# Altium PCB PCB2.PcbDoc (part 1 of 2)
Units mil, origin at the board's own origin, x right, y up, seen from the top; angles counter-clockwise.
Board outline 1075 x 1370 mil, 4 copper layers (Top Layer, Ground, Power, Bottom Layer), stack 61.4 mil thick; 62 components, 54 nets, 255 pads, 74 vias.
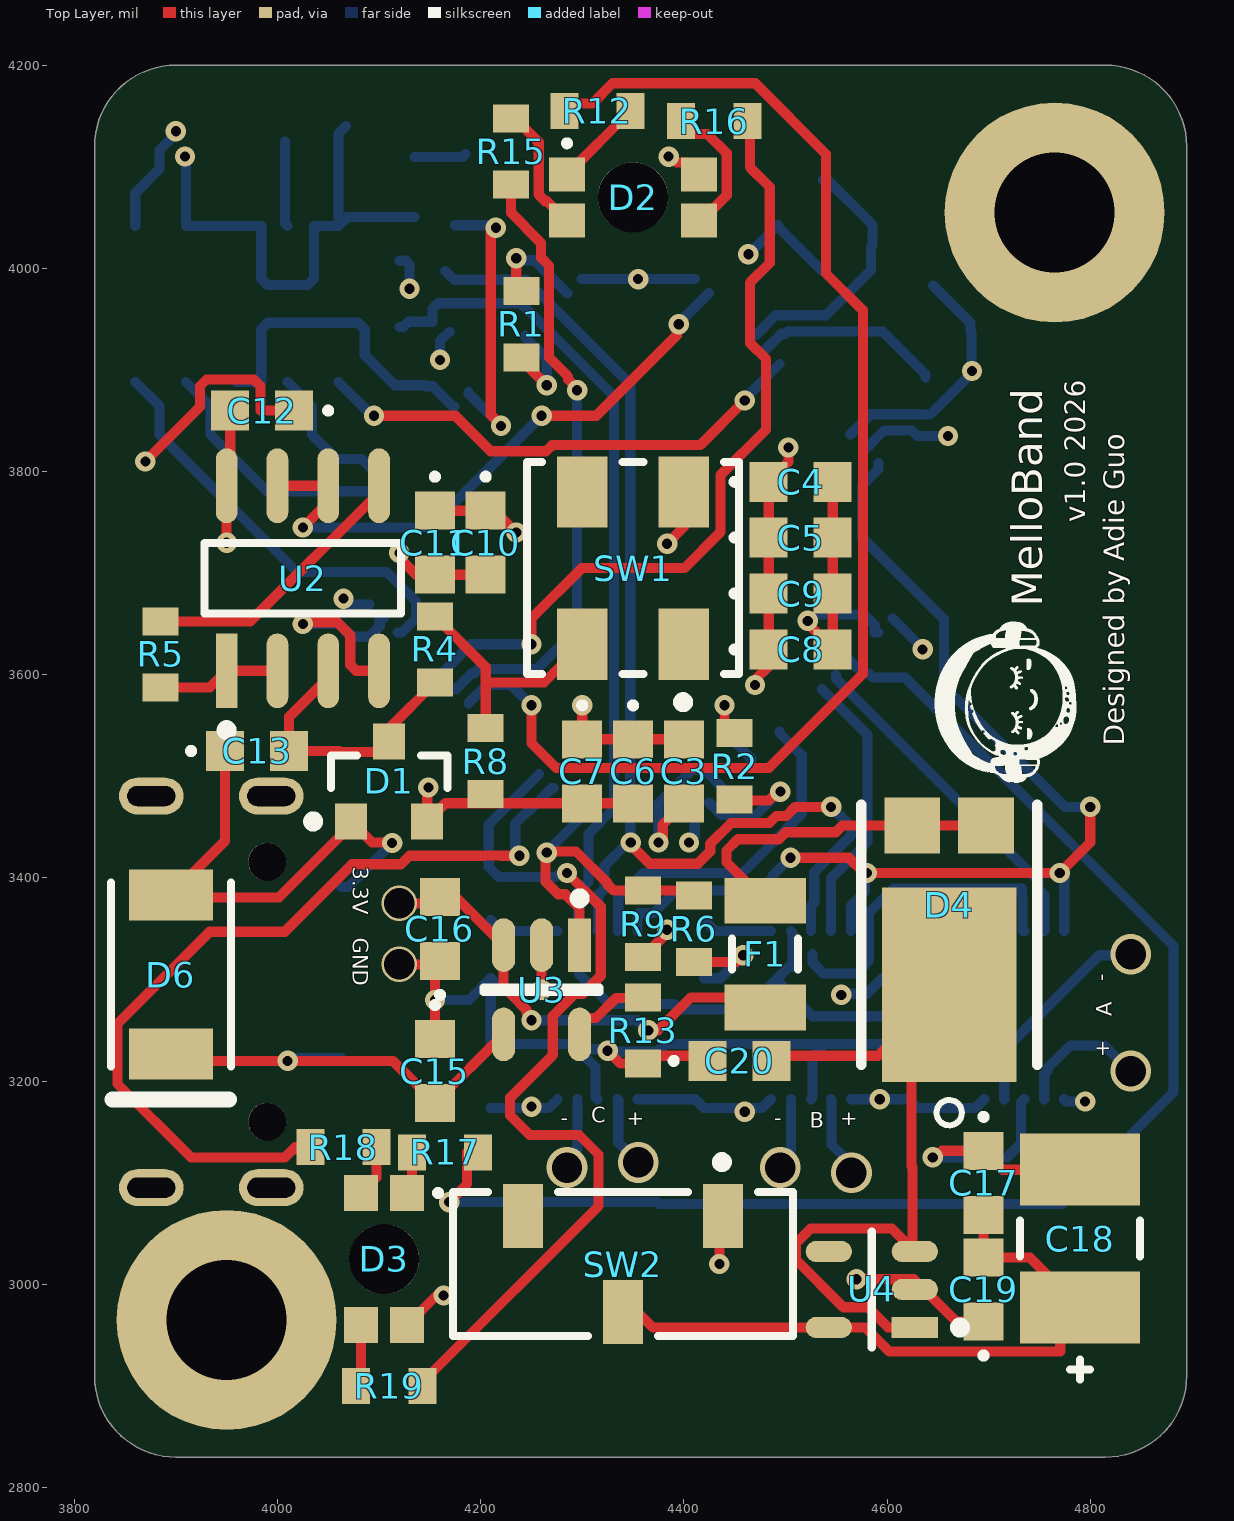
[diagram p0: Top Layer view]
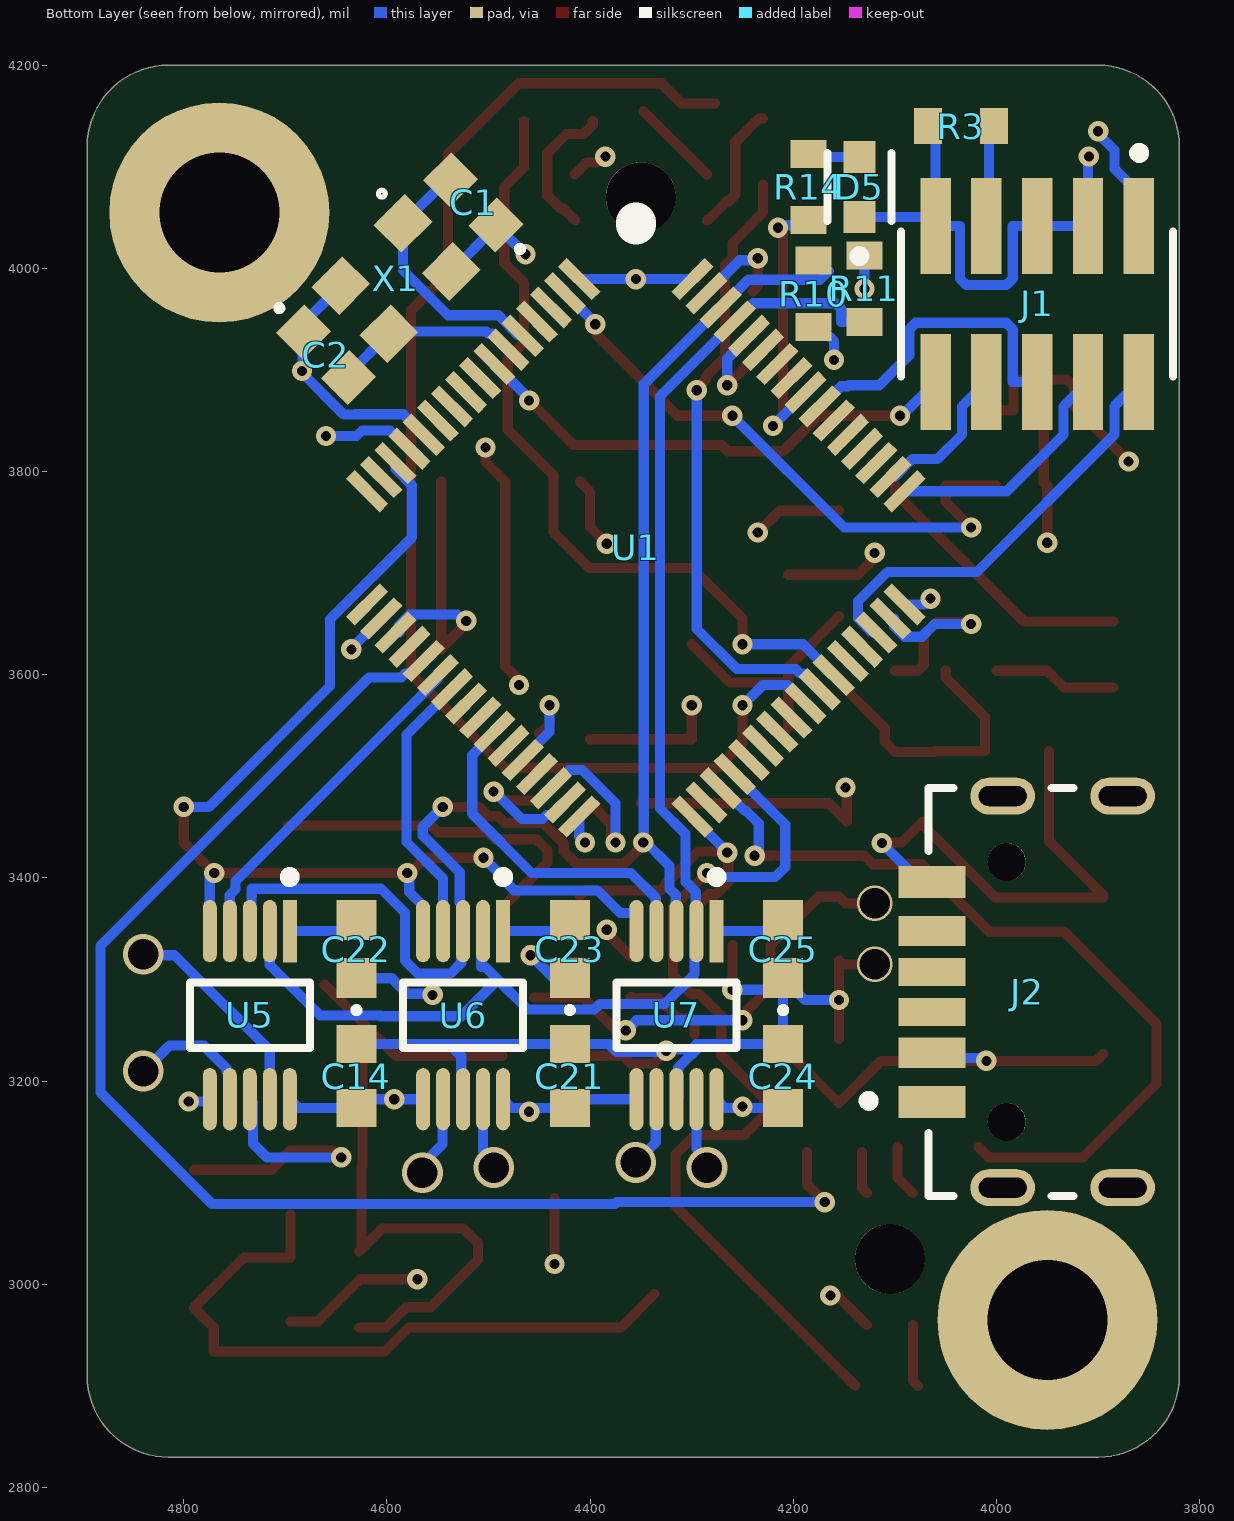
[diagram p1: Bottom Layer view, seen from below]
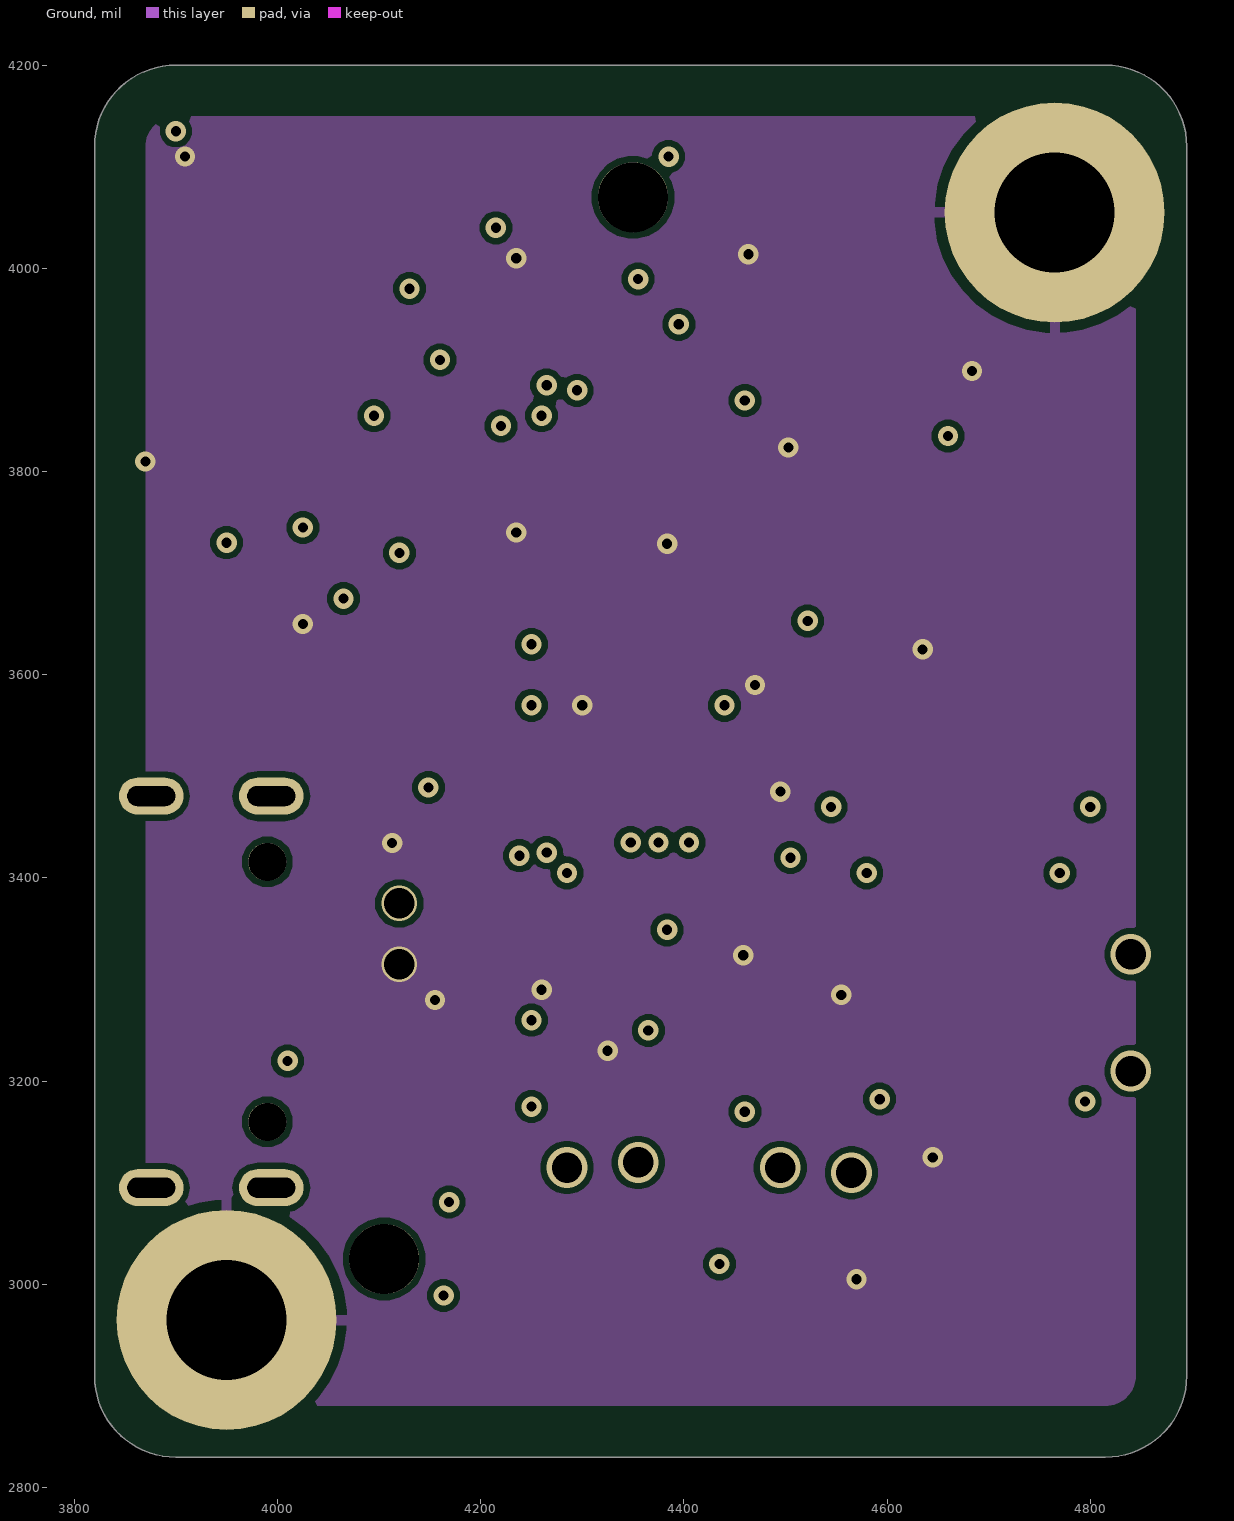
[diagram p2: Ground]
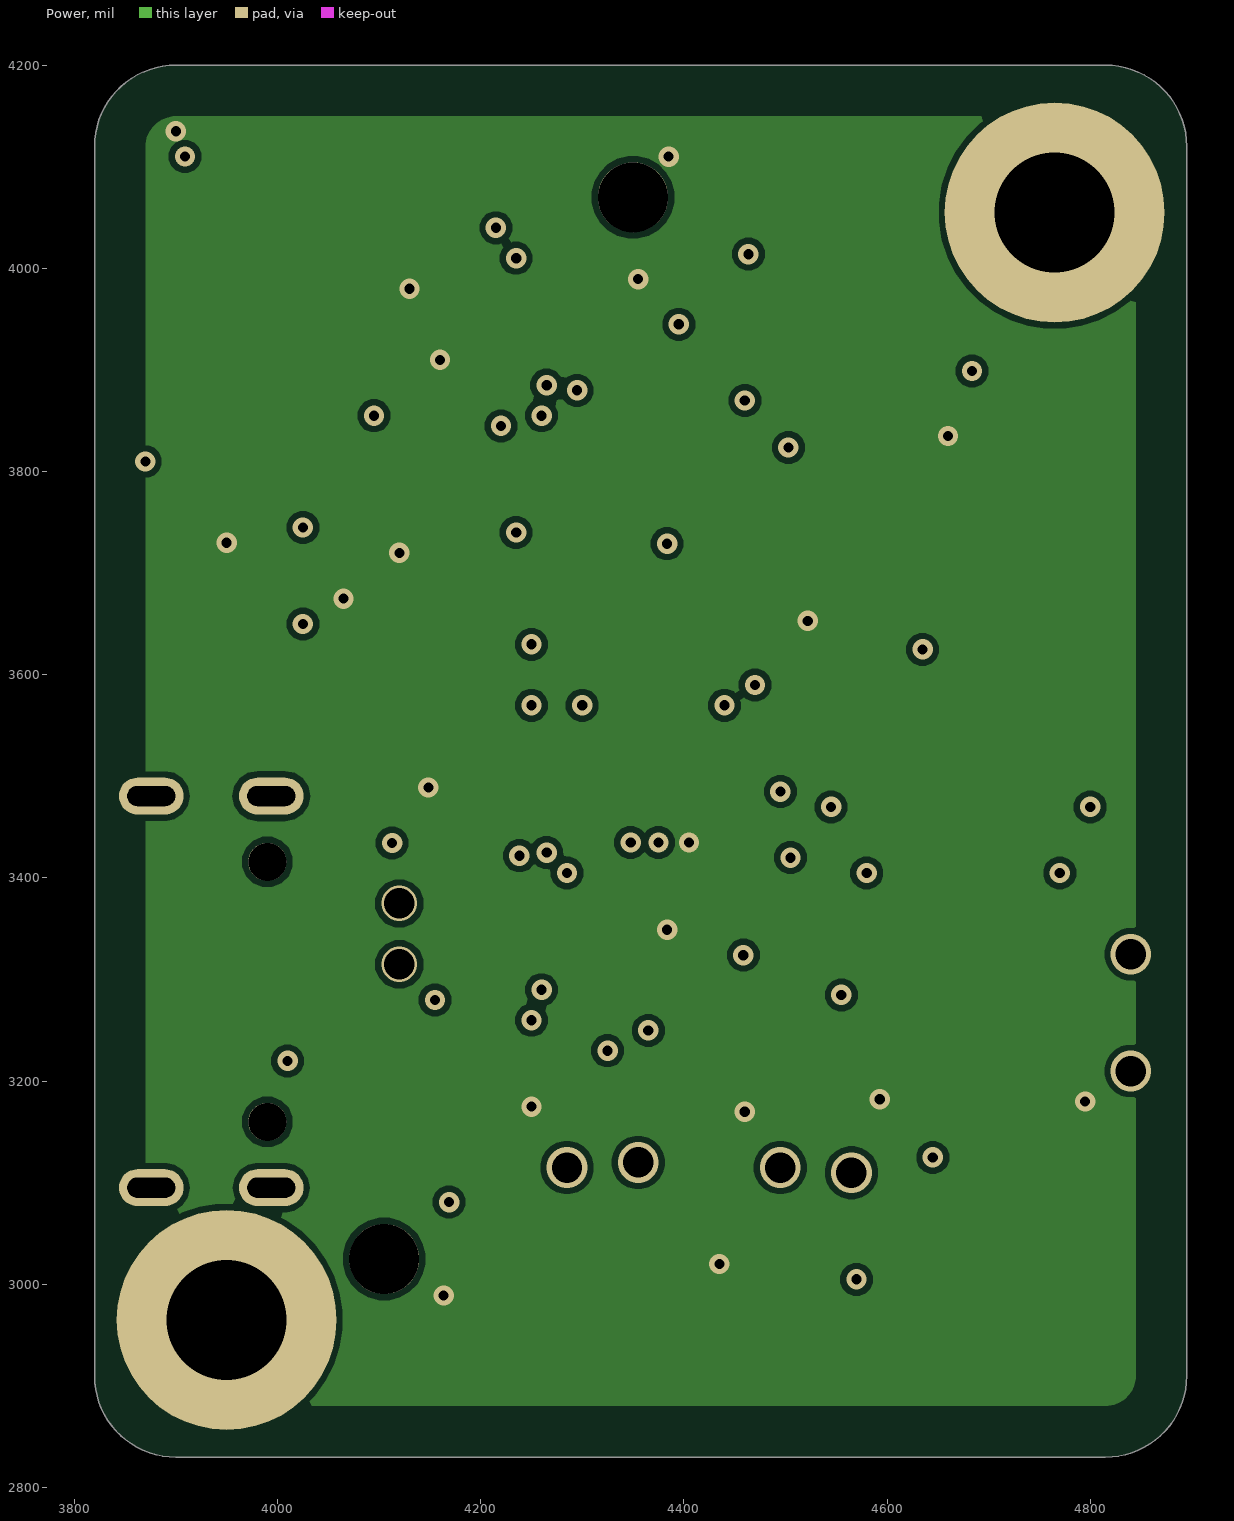
[diagram p3: Power]
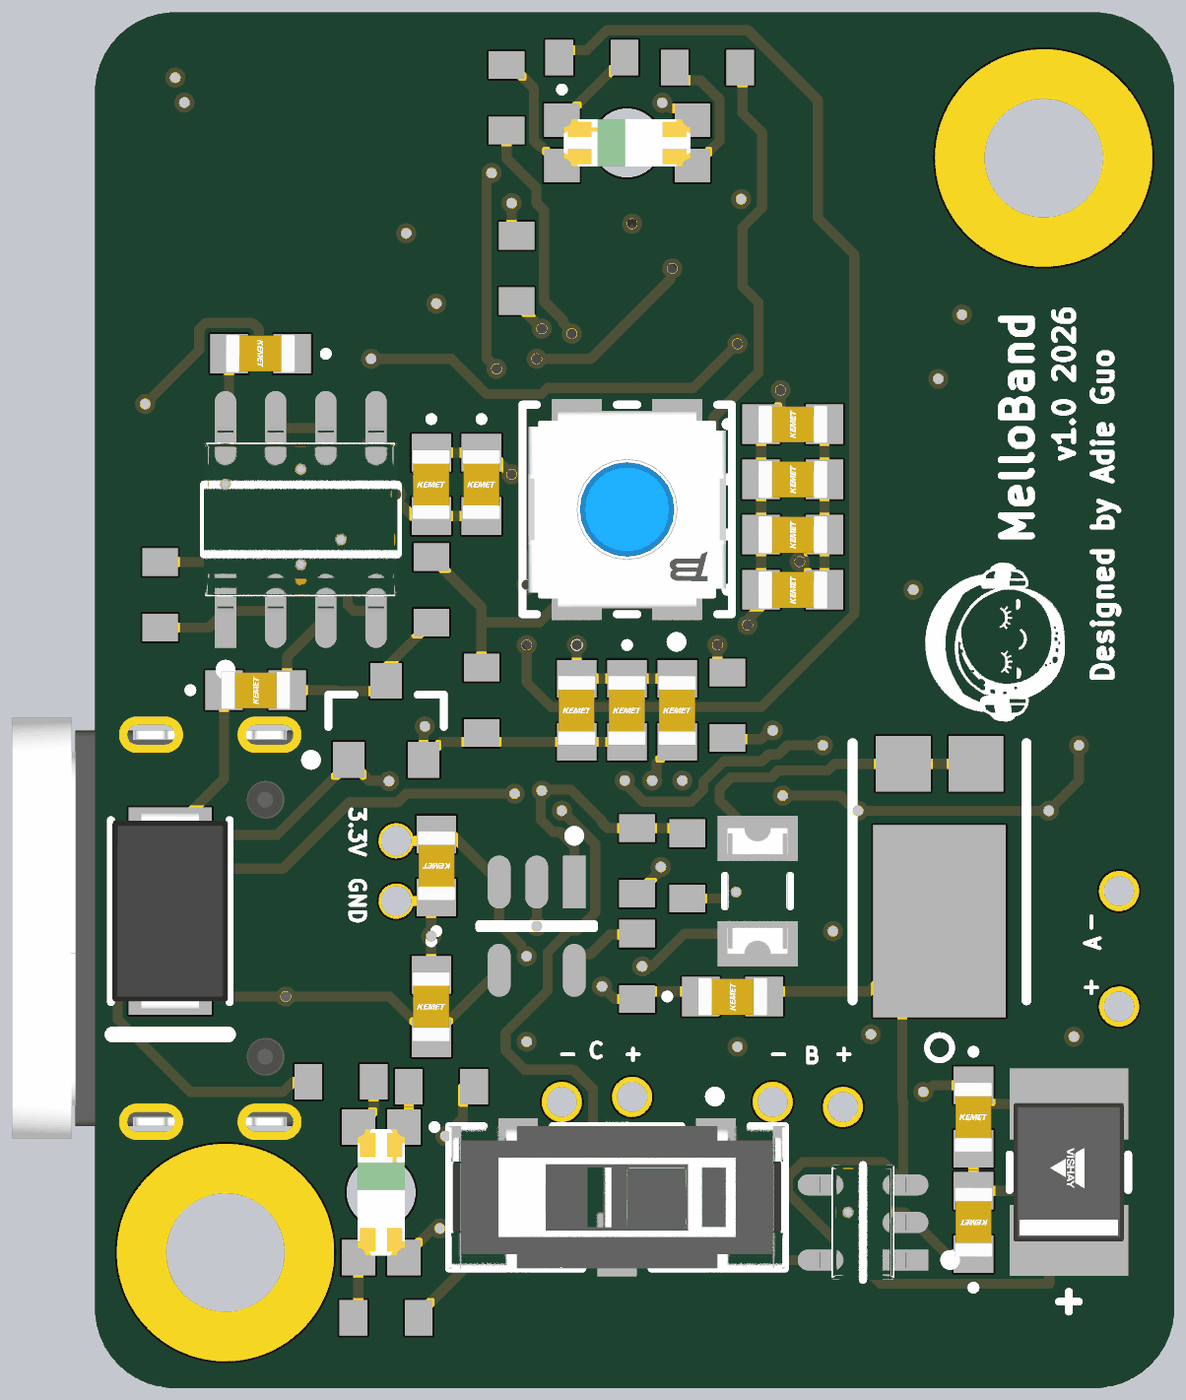
[diagram p4: 3D render of the assembled board from above, using the file's embedded part models]
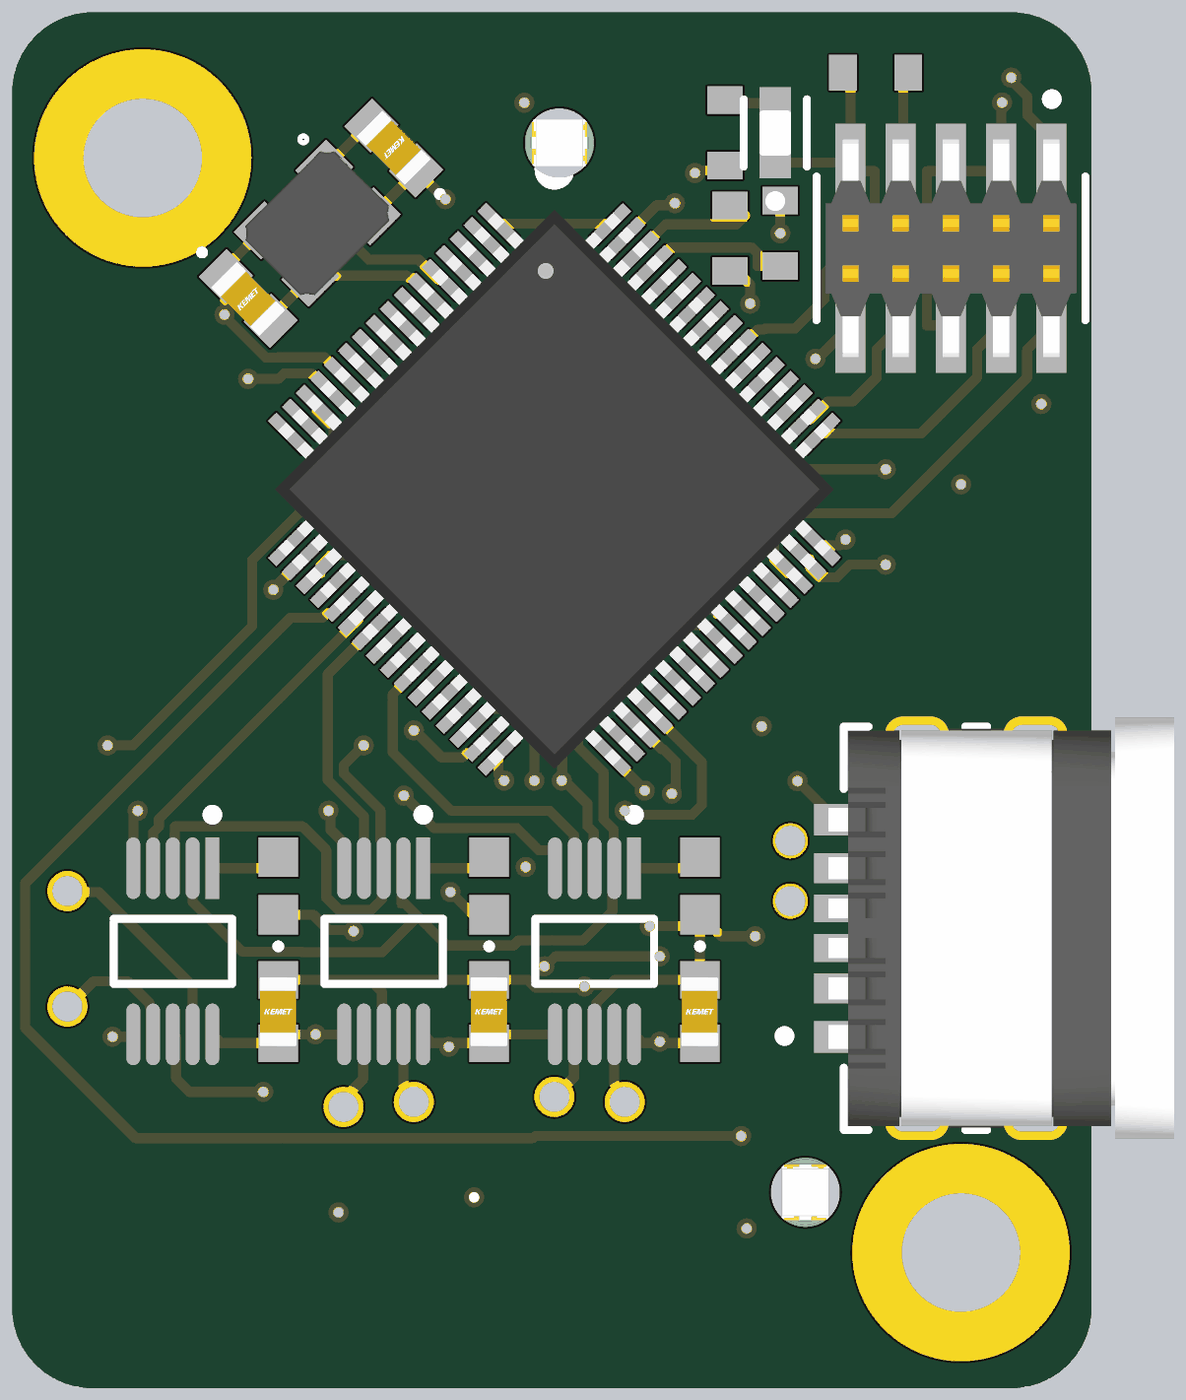
[diagram p5: 3D render of the assembled board from below, using the file's embedded part models]

## Layer stack, top to bottom
Top Solder: solder mask 0.4, Solder Resist, Dk 3.5
Top Layer: signal copper 1.4
Dielectric 2: prepreg 8.4, PP-006, Dk 4.1
Ground: signal copper 1.4
Dielectric 1: dielectric 39, FR-4, Dk 4.8
Power: signal copper 1.4
Dielectric 3: prepreg 8.4, PP-006, Dk 4.1
Bottom Layer: signal copper 1.4
Bottom Solder: solder mask 0.4, Solder Resist, Dk 3.5

## Board outline
3820,2910 3820,4120 cw(c3900,4120) 3900,4200 4815,4200 cw(c4815,4120) 4895,4120 4895,2910 cw(c4815,2910) 4815,2830 3900,2830 cw(c3900,2910)

## Design rules (kind name [scope] priority, off if disabled: settings)
BoardOutlineClearance [All] p1: gap=50 ignorepadtopadclearanceinfootprint=FALSE except(0: Arc-OutlineEdge Track-OutlineEdge Text-OutlineEdge; 20: SMDPad-OutlineEdge THPad-OutlineEdge Via-OutlineEdge Fill-OutlineEdge Region-OutlineEdge)
Clearance [All] p1: gap=6 ignorepadtopadclearanceinfootprint=FALSE except(4.5: Arc-SMDPad Track-SMDPad SMDPad-SMDPad)
DiffPairsRouting [All] p1: maxlimit=10 minlimit=8 mostfreqgap=10 toplayer_maxgap=8 toplayer_prefgap=8 toplayer_minwidth=8 toplayer_maxwidth=8 toplayer_prefwidth=8 midlayer1_mingap=10 midlayer1_minwidth=15 midlayer1_maxwidth=15 midlayer1_prefwidth=15 midlayer2_mingap=10 midlayer2_minwidth=15 midlayer2_maxwidth=15 midlayer2_prefwidth=15 bottomlayer_maxgap=8 bottomlayer_prefgap=8 bottomlayer_minwidth=8 bottomlayer_maxwidth=8 bottomlayer_prefwidth=8 maxuncoupledlength=500
HoleSize [All] p1: absolutevalues=TRUE maxlimit=500 minlimit=10 maxpercent=80.000 minpercent=20.000
MinimumAnnularRing [All] p1: minimumring=5
MinimumSolderMaskSliver [All] p1 off: minsoldermaskwidth=10
NetAntennae NetAntennae_MountingHoles [IsVia And InComponent('M*')] p1: netantennaetolerance=-1
NetAntennae [All] p2: netantennaetolerance=0
PolygonConnect PolygonConnect_Relief [IsPad and not (InComponent('M*'))] p1: connectstyle=Relief reliefconductorwidth=10 reliefentries=4 polygonreliefangle="90 Angle" airgapwidth=10
PolygonConnect PolygonConnect_Direct [All] p2: connectstyle=Direct reliefconductorwidth=10 reliefentries=4 polygonreliefangle="90 Angle" airgapwidth=10
RoutingVias [All] p1: holewidth=16 width=32 viastyle="Through Hole" minholewidth=16 minwidth=32 maxholewidth=100 maxwidth=200
ShortCircuit "Mounting Hole Exception" [IsVia And InComponent('M*') vs InComponent('M*')] p1: allowed=TRUE
ShortCircuit [All] p2: allowed=FALSE
SilkToSilkClearance [All] p1 off: silktosilkclearance=10
SilkToSolderMaskClearance [IsPad] p1 off: minsilkscreentomaskgap=10 clearancetoexposedcopper=TRUE
SolderMaskExpansion [All] p1: expansion=2 istentingtop=FALSE
Width [All] p1: maxlimit=500 minlimit=6 preferedwidth=10 midlayer1_minwidth=8 midlayer2_minwidth=8 minimp=50.000000 maximp=50.000000 favimp=50.000000
23 further rules are at their usual default settings.

## Classes and differential pairs
component class Power: 43 C15 C16 C17 C18 C19 C20 D4 D6 F1 R6 R9 R13 U3 U4
component class MCU-power: C3 C4 C5 C6 C7 C8 C9 C10 C11
component class MCU-io: C1 C2 J1 R1 R2 R3 U1 X1
component class Interface: D2 D3 D5 R8 R12 R14 R15 R16 R17 R18 R19 SW1 SW2
component class "Haptic Drivers": C14 C21 C22 C23 C24 C25 R10 R11 U5 U6 U7
component class "Analog Input Conditioning": C12 C13 D1 R4 R5 U2

## Components (designator, comment, footprint, x,y, rotation, side; value= is the part's Value field where it differs from the comment)
C1 "CL10C100JB8NNNC" CAP-0603 4515,4065 r45 bottom
C2 "CL10C100JB8NNNC" CAP-0603 4660,3915 r225 bottom
C3 "CL10A475KO8NNNC" CAP-0603 4400,3505 r270 top
C4 "CC0603KRX7R9BB104" CAP-0603 4515,3790 r0 top
C5 "CL10A105KB8NNNC" CAP-0603 4515,3735 r0 top
C6 "CL10A106KP8NNNC" CAP-0603 4350,3505 r270 top
C7 "CC0603KRX7R9BB104" CAP-0603 4300,3505 r270 top
C8 "CC0603KRX7R9BB104" CAP-0603 4515,3625 r0 top
C9 "CC0603KRX7R9BB104" CAP-0603 4515,3680 r0 top
C10 "CC0603KRX7R9BB104" CAP-0603 4205,3730 r270 top
C11 "CC0603KRX7R9BB104" CAP-0603 4155,3730 r270 top
C12 "CC0603KRX7R9BB104" CAP-0603 3985,3860 r180 top
C13 "CL10B473KB8NNNC" CAP-0603 3980,3525 r0 top
C14 "CC0603KRX7R9BB104" CAP-0603 4630,3205 r270 bottom
C15 "CL10A475KO8NNNC" CAP-0603 4155,3210 r270 top
C16 "CL10A475KO8NNNC" CAP-0603 4160,3350 r90 top
C17 "CL10A105KB8NNNC" CAP-0603 4695,3100 r270 top
C18 "293D106X9025B2TE3" FP-293DB-MFG 4790,3045 r270 top
C19 "CC0603KRX7R9BB104" CAP-0603 4695,2995 r90 top
C20 "CL10A106KP8NNNC" CAP-0603 4455,3220 r0 top
C21 "CC0603KRX7R9BB104" CAP-0603 4420,3205 r270 bottom
C22 "1uF" CAP_SM0603_YAGEOCC2_N 4630,3330 r270 bottom
C23 "1uF" CAP_SM0603_YAGEOCC2_N 4420,3330 r270 bottom
C24 "CC0603KRX7R9BB104" CAP-0603 4210,3205 r270 bottom
C25 "1uF" CAP_SM0603_YAGEOCC2_N 4210,3330 r270 bottom
D1 "MMBD452LT1G" ONSC-SOT-23-3-318-08_V 4110,3495 r90 top
D2 "156125M173000" "WL-SFRW_1205_reverse use" 4350,4070 r0 top
D3 "156125M173000" "WL-SFRW_1205_reverse use" 4105,3025 r270 top
D4 "SBRT15U50SP5-13" SBRT15U50SP5-13 4661.22,3295 r180 top
D5 "LTST-C193TBKT-5A" FP-LTST-C193TBKT-5A-MFG 4135,4080 r90 bottom
D6 "SMAJ5.0A" BOUR-SMA-2_V 3895,3305 r270 top
F1 "500mA" FP-0466-MFG 4480,3325 r90 top value=0.248Ω
J1 "20021121-00010C4LF" FP-20021121-00010C4LF-MFG 3960,3965 r0 bottom
J2 "217176-0001" FP-217176-0001-MFG 3908.31,3287.95 r90 bottom
R1 "0603WAF1002T5E" RES-0603 4240,3945 r90 top
R2 "0603WAF1002T5E" RES-0603 4450,3510 r270 top
R3 "0603WAF1002T5E" RES-0603 4035,4140 r0 bottom
R4 "0603WAF1002T5E" RES-0603 4155,3625 r270 top
R5 "0603WAF2201T5E" RES-0603 3885,3620 r90 top
R6 "10K" RES_SM0603_YAGEORC_N 4410,3350 r90 top
R8 "10K" RES_SM0603_YAGEORC_N 4205,3515 r270 top
R9 "10K" RES_SM0603_YAGEORC_N 4360,3355 r270 top
R10 "2K2" RES_SM0603_YAGEORC_N 4180,3975 r270 bottom
R11 "2K2" RES_SM0603_YAGEORC_N 4130,3980 r90 bottom
R12 "0603WAF1000T5E" RES-0603 4315,4155 r180 top
R13 "0603WAF2001T5E" RES-0603 4360,3250 r90 top
R14 "0603WAF1000T5E" RES-0603 4185,4080 r90 bottom
R15 "0603WAF1000T5E" RES-0603 4230,4115 r270 top
R16 "0603WAF1000T5E" RES-0603 4430,4145 r0 top
R17 "0603WAF1000T5E" RES-0603 4165,3130 r0 top
R18 "0603WAF1000T5E" RES-0603 4065,3135 r180 top
R19 "0603WAF1000T5E" RES-0603 4110,2900 r0 top
SW1 "7914J-1-032E" FP-7914J-1-032E-MFG 4350,3705 r180 top
SW2 "JS102011JCQN" FP-JS102011JCQN-MFG 4340,3020 r180 top
U1 "IC MCU 32BIT 1MB FLASH 64LQFP" LQFP64-10x10mm 4355,3725 r225 bottom value=Value
U2 "OPA2991IDR" FP-D0008A-IPC_C 4025,3695 r90 top
U3 "MCP73831T-2ACI/OT" FP-C04-091-OT-IPC_B 4260,3290 r270 top
U4 "MIC5219-3.3YM5-TR" FP-SOT23-5LD-PL-1-IPC_C 4585,2995 r180 top
U5 "DRV2605LTDGSRQ1" FP-DGS0010A-IPC_B 4735,3265 r270 bottom
U6 "DRV2605LTDGSRQ1" FP-DGS0010A-IPC_B 4525,3265 r270 bottom
U7 "DRV2605LTDGSRQ1" FP-DGS0010A-IPC_B 4315,3265 r270 bottom
X1 "7M-25.000MEEQ-T" OSCSC320X250X100N 4591.11,3990 r225 bottom

## Footprints (in the part's own frame and the unit in brackets; to place one, negate y for a bottom-side part, rotate by r counter-clockwise, add the part's x,y. Pads: shape width x height; smd on the part's side, far side on the other; paste and mask are expansions set on the pad)
BOUR-SMA-2_V [mm] "SMA, 2-Leads, Body 4.57x2.92mm"
  rect 1.27x2.1 smd: 1(-1.985,0) 2(1.985,0)
  silkscreen extent -2.3,-1.5 3.12,1.5, body extent -2.5,-1.46 2.5,1.46, height 2.62
CAP-0603 [mm]
  rect 0.95x1 smd: 1(-0.8,0) 2(0.8,0)
  silkscreen extent -1.7,-0.05 -1.6,0.05, body extent -0.87,-0.48 0.88,0.47, height 0.87
CAP_SM0603_YAGEOCC2_N [mm] "Capacitor, Yageo CC Class2, SM0603, IPC Medium Density"
  rect 1x1 smd: 1(-0.727,0) 2(0.727,0)
  body extent -0.9,-0.5 0.9,0.5, height 0.9
FP-293DB-MFG [mm]
  rect 1.8x3 smd paste+0 mask+0: 1(-1.725,0) 2(1.725,0)
  silkscreen extent -0.45,-1.5 3.53,1.5, body extent -2.73,-1.6 2.73,1.6, height 0.25
FP-0466-MFG [mil]
  rect 45x80 smd paste+0 mask+0: 1(-52.5,0) 2(52.5,0)
  silkscreen extent -15,-32 15,32, body extent -79,-44 79,44, height 10
FP-7914J-1-032E-MFG [mm]
  rect 1.27x1.78 smd paste+0 mask+0: 1_1-(-1.27,1.905) 1_2+(1.27,1.905) 2_1-(-1.27,-1.905) 2_2+(1.27,-1.905)
  silkscreen extent -2.65,-2.65 2.65,3.47, body extent -2.75,-2.9 2.75,2.9, height 0.25
FP-217176-0001-MFG [mm]
  rrect100% 0.92x1.62 hole 1.2 slot 0.5 at 0 deg paste-1000 mask+0: 1(-4.895,2.175) 2(4.895,2.175) 3(-4.895,-0.825) 4(4.895,-0.825)
  rect 0.8x1.67 smd paste+0 mask+0: C1(-2.75,3.94) C6(2.75,3.94)
  rect 0.76x1.67 smd paste+0 mask+0: C2(-1.52,3.94) C5(1.52,3.94)
  rect 0.7x1.67 smd paste+0 mask+0: C3(-0.5,3.94) C4(0.5,3.94)
  round 0.95 hole 0.95 unplated paste-1000 mask+0: ""(-3.25,2.075) ""(3.25,2.075)
  silkscreen extent -5.1,0.4 5.1,5.65, body extent -5.32,-4.34 5.32,4.42, height 4.81
FP-20021121-00010C4LF-MFG [mm]
  rect 0.76x2.4 smd paste+0 mask+0: 1(-2.54,-1.95) 2(-2.54,1.95) 3(-1.27,-1.95) 4(-1.27,1.95) 5(0,-1.95) 6(0,1.95) 7(1.27,-1.95) 8(1.27,1.95) 9(2.54,-1.95) 10(2.54,1.95)
  silkscreen extent -3.4,-3.9 3.4,1.82, body extent -3.18,-2.75 3.17,2.75, height 4.85
FP-C04-091-OT-IPC_B [mm]
  rect 1.338x0.578 smd paste+0 mask+0: 1(-1.116,0.95)
  rrect100% 1.338x0.578 smd paste+0 mask+0: 2(-1.116,0) 3(-1.116,-0.95) 4(1.116,-0.95) 5(1.116,0.95)
  silkscreen extent -2.41,-1.45 0.05,1.45
FP-D0008A-IPC_C [mil]
  rect 73.59x21.34 smd paste+0 mask+0: 1(-91.09,75)
  rrect100% 73.59x21.34 smd paste+0 mask+0: 2(-91.09,25) 3(-91.09,-25) 4(-91.09,-75) 5(91.09,-75) 6(91.09,-25) 7(91.09,25) 8(91.09,75)
  silkscreen extent -154,-97 35,97, body extent -132,-100 132,100, height 10
FP-DGS0010A-IPC_B [mm]
  rect 1.557x0.35 smd paste+0 mask+0: 1(-2.101,1)
  rrect100% 1.557x0.35 smd paste+0 mask+0: 2(-2.101,0.5) 3(-2.101,0) 4(-2.101,-0.5) 5(-2.101,-1) 6(2.101,-1) 7(2.101,-0.5) 8(2.101,0) 9(2.101,0.5) 10(2.101,1)
  silkscreen extent -3.58,-1.5 0.82,1.5
FP-JS102011JCQN-MFG [mm]
  rect 1x1.6 smd paste+0 mask+0: 1(-2.5,-1.2) 2(0,1.2) 3(2.5,-1.2)
  silkscreen extent -4.25,-2.67 4.25,1.8, body extent -4.35,-2.1 4.35,2.1, height 0.25
FP-LTST-C193TBKT-5A-MFG [mm]
  rect 0.8x0.8 smd paste+0 mask+0: 1(-0.75,0) 2(0.75,0)
  silkscreen extent -1.85,-0.8 0.85,0.8, body extent -0.8,-0.4 0.8,0.4, height 0.45
FP-SOT23-5LD-PL-1-IPC_C [mm]
  rect 1.156x0.53 smd paste+0 mask+0: 1(-1.075,0.95)
  rrect100% 1.156x0.53 smd paste+0 mask+0: 2(-1.075,0) 3(-1.075,-0.95) 4(1.075,-0.95) 5(1.075,0.95)
  silkscreen extent -2.33,-1.45 0,1.45, body extent -1.4,-1.45 1.4,1.45, height 1.45
LQFP64-10x10mm [mil]
  rect 47x12 smd: 1(-226.38,147.64) 2(-226.38,127.95) 3(-226.38,108.27) 4(-226.38,88.58) 5(-226.38,68.9) 6(-226.38,49.21) 7(-226.38,29.53) 8(-226.38,9.84) 9(-226.38,-9.84) 10(-226.38,-29.53) 11(-226.38,-49.21) 12(-226.38,-68.9) 13(-226.38,-88.58) 14(-226.38,-108.27) 15(-226.38,-127.95) 16(-226.38,-147.64) 33(226.38,-147.64) 34(226.38,-127.95) 35(226.38,-108.27) 36(226.38,-88.58) 37(226.38,-68.9) 38(226.38,-49.21) 39(226.38,-29.53) 40(226.38,-9.84) 41(226.38,9.84) 42(226.38,29.53) 43(226.38,49.21) 44(226.38,68.9) 45(226.38,88.58) 46(226.38,108.27) 47(226.38,127.95) 48(226.38,147.64)
  rect 12x47 smd: 17(-147.64,-226.38) 18(-127.95,-226.38) 19(-108.27,-226.38) 20(-88.58,-226.38) 21(-68.9,-226.38) 22(-49.21,-226.38) 23(-29.53,-226.38) 24(-9.84,-226.38) 25(9.84,-226.38) 26(29.53,-226.38) 27(49.21,-226.38) 28(68.9,-226.38) 29(88.58,-226.38) 30(108.27,-226.38) 31(127.95,-226.38) 32(147.64,-226.38) 49(147.64,226.38) 50(127.95,226.38) 51(108.27,226.38) 52(88.58,226.38) 53(68.9,226.38) 54(49.21,226.38) 55(29.53,226.38) 56(9.84,226.38) 57(-9.84,226.38) 58(-29.53,226.38) 59(-49.21,226.38) 60(-68.9,226.38) 61(-88.58,226.38) 62(-108.27,226.38) 63(-127.95,226.38) 64(-147.64,226.38)
  silkscreen extent -226,225 -225,226, body extent -236,-236 236,236, height 63
ONSC-SOT-23-3-318-08_V [mm] "SOT23, 3-Leads, Body 2.92x1.3mm, Pitch 0.95mm"
  rect 0.9x0.8 smd: 1(-1,0.95) 2(-1,-0.95) 3(1,0)
  silkscreen extent -1.12,-1.46 0.65,2.02, body extent -0.65,-1.46 0.65,1.46, height 1.11
OSCSC320X250X100N [mm]
  rect 0.98x1.1 smd: 1(-0.85,1.1) 2(-0.85,-1.1) 3(0.85,-1.1) 4(0.85,1.1)
  silkscreen extent -1.84,1.16 -1.66,1.34, body extent -1.24,-1.6 1.24,1.6, height 0.99
RES-0603 [mm] "Resistor, Yageo RC_L, SM0603, IPC Medium Density"
  rect 0.7x0.9 smd: 1(-0.827,0) 2(0.827,0)
  body extent -0.85,-0.45 0.85,0.45, height 0.55
RES_SM0603_YAGEORC_N [mm] "Resistor, Yageo RC_L, SM0603, IPC Medium Density"
  rect 0.7x0.9 smd: 1(-0.827,0) 2(0.827,0)
  body extent -0.85,-0.45 0.85,0.45, height 0.55
SBRT15U50SP5-13 [mm]
  rect 1.39x1.4 smd: 1(-0.92,-3.982) 1(0.92,-3.982)
  rect 3.36x4.86 smd: 2(0,0)
  silkscreen extent -2.2,-4.5 2.2,3.52, body extent -2,-4.6 2,2.4, height 1.05
"WL-SFRW_1205_reverse use" [mm] "SMD Full-color Reverse mount LED, body 3.2x1.2mm"
  rect 0.9x0.85 smd: 1(-1.65,0.575) 2(-1.65,-0.575) 3(1.65,-0.575) 4(1.65,0.575)
  round 1.75 hole 1.75 unplated: MH1(0,0)
  silkscreen extent -1.72,1.28 -1.57,1.42, body extent -1.6,-0.6 1.6,0.6, height 0.28

## Part data
C1 C2: "Capacitor, Ceramic (MLCC), 10pF, ±5%, 50V, C0G, ±5%, SMD 0603", Capacitance=10pF, JLCPCB Basic Part=Yes, JLCPCB Part Number=C1634, Manufacturer="Samsung Electro-Mechanics", Package Size=0603, Temperature Coefficient=C0G, Temperature Rating="-55°C ~ 125°C", Tolerance=±5%, Voltage Rating=50V, Category="Capacitors - MLCC", ComponentLink1Description=Datasheet, ComponentLink1URL=https://wmsc.lcsc.com/wmsc/upload/file/pdf/v2/lcsc/2304140030_Samsung-Electro-Mechanics-CL10C100JB8NNNC_C1634.pdf, ComponentLink2Description="JLCPCB Part URL", ComponentLink2URL=https://jlcpcb.com/partdetail/C1634, ComponentLink3Description="LCSC Part URL", ComponentLink3URL=https://lcsc.com/product-detail/Multilayer-Ceramic-Capacitors-MLCC---SMD-SMT_Samsung-Electro-Mechanics-Samsung-Electro-Mechanics-CL10C100JB8NNNC_C1634.html, ComponentLink4Description="Samsung Component Library", ComponentLink4URL=https://weblib.samsungsem.com/mlcc/mlcc-ec.do?partNumber=CL10C100JB8NNN, Impedance (0V Bias) @ 1GHz=12.8Ω, Impedance (0V Bias) @ 2GHz=1.36Ω, Impedance (0V Bias) @ 5GHz=12.1Ω, Impedance (0V Bias) @ 100MHz=159Ω, Impedance (0V Bias) @ 500MHz=30.3Ω, Manufacturer Part Number=CL10C100JB8NNNC, RoHS=Yes, Supplier 1=LCSC, Supplier Part Number 1=C1634
C3 C15 C16: "Capacitor, Ceramic (MLCC), 4.7uF, ±10%, 16V, X5R, ±10%, SMD 0603", Capacitance=4.7uF, Capacitance @ 1.2V DC Bias=4.030uF, Capacitance @ 1.5V DC Bias=3.908uF, Capacitance @ 1.8V DC Bias=3.769uF, Capacitance @ 1.35V DC Bias=3.972uF, Capacitance @ 1V DC Bias=4.097uF, Capacitance @ 2.5V DC Bias=3.406uF, Capacitance @ 3.3V DC Bias=2.969uF, Capacitance @ 3.7V DC Bias=2.760uF, Capacitance @ 4.2V DC Bias=2.508uF, Capacitance @ 5V DC Bias=2.138uF, Capacitance @ 9V DC Bias=1.155uF, Capacitance @ 12V DC Bias=0.873uF, Capacitance @ 15V DC Bias=0.647uF, JLCPCB Basic Part=Yes, JLCPCB Part Number=C19666, Manufacturer="Samsung Electro-Mechanics", Package Size=0603, Temperature Coefficient=X5R, Temperature Rating="-55°C ~ 85°C", Tolerance=±10%, Voltage Rating=16V, Category="Capacitors - MLCC", ComponentLink1Description=Datasheet, ComponentLink1URL=https://wmsc.lcsc.com/wmsc/upload/file/pdf/v2/lcsc/2304140030_Samsung-Electro-Mechanics-CL10A475KO8NNNC_C19666.pdf, ComponentLink2Description="JLCPCB Part URL", ComponentLink2URL=https://jlcpcb.com/partdetail/C19666, ComponentLink3Description="LCSC Part URL", ComponentLink3URL=https://lcsc.com/product-detail/Multilayer-Ceramic-Capacitors-MLCC---SMD-SMT_Samsung-Electro-Mechanics-Samsung-Electro-Mechanics-CL10A475KO8NNNC_C19666.html, ComponentLink4Description="Samsung Component Library", ComponentLink4URL=https://weblib.samsungsem.com/mlcc/mlcc-ec.do?partNumber=CL10A475KO8NNN, Impedance (0V Bias) @ 1GHz=1.02Ω, Impedance (0V Bias) @ 1kHz=46Ω, Impedance (0V Bias) @ 1MHz=0.05Ω, Impedance (0V Bias) @ 2GHz=2.37Ω, Impedance (0V Bias) @ 5GHz=4.65Ω, Impedance (0V Bias) @ 5kHz=9.51Ω, Impedance (0V Bias) @ 5MHz=0.011Ω, Impedance (0V Bias) @ 10kHz=4.83Ω, Impedance (0V Bias) @ 10MHz=0.0248Ω, Impedance (0V Bias) @ 50kHz=0.996Ω, Impedance (0V Bias) @ 50MHz=0.0811Ω, Impedance (0V Bias) @ 100Hz=437Ω, Impedance (0V Bias) @ 100kHz=0.505Ω, Impedance (0V Bias) @ 100MHz=0.141Ω, Impedance (0V Bias) @ 500Hz=90.6Ω, Impedance (0V Bias) @ 500kHz=0.104Ω, Impedance (0V Bias) @ 500MHz=0.57Ω, Impedance (16V Bias) @ 1GHz=1.06Ω, Impedance (16V Bias) @ 1kHz=381Ω, Impedance (16V Bias) @ 1MHz=0.386Ω, Impedance (16V Bias) @ 2GHz=2.36Ω, Impedance (16V Bias) @ 5GHz=4.63Ω, Impedance (16V Bias) @ 5kHz=77.1Ω, Impedance (16V Bias) @ 5MHz=0.077Ω, Impedance (16V Bias) @ 10kHz=38.7Ω, Impedance (16V Bias) @ 10MHz=0.0173Ω, Impedance (16V Bias) @ 50kHz=7.82Ω, Impedance (16V Bias) @ 50MHz=0.0836Ω, Impedance (16V Bias) @ 100Hz=3.74E+03Ω, Impedance (16V Bias) @ 100kHz=3.93Ω, Impedance (16V Bias) @ 100MHz=0.142Ω, Impedance (16V Bias) @ 500Hz=758Ω, Impedance (16V Bias) @ 500kHz=0.79Ω, Impedance (16V Bias) @ 500MHz=0.585Ω, Manufacturer Part Number=CL10A475KO8NNNC, RoHS=Yes, Supplier 1=LCSC, Supplier Part Number 1=C19666
C4 C7 C8 C9 C10 C11 C12 C14 C19 C21 C24: "Capacitor, Ceramic (MLCC), 100nF, ±10%, 50V, X7R, ±10%, SMD 0603", Capacitance=100nF, JLCPCB Basic Part=Yes, JLCPCB Part Number=C14663, Manufacturer=YAGEO, Package Size=0603, Temperature Coefficient=X7R, Tolerance=±10%, Voltage Rating=50V, Category="Capacitors - MLCC", ComponentLink1Description=Datasheet, ComponentLink1URL=https://wmsc.lcsc.com/wmsc/upload/file/pdf/v2/lcsc/2211101700_YAGEO-CC0603KRX7R9BB104_C14663.pdf, ComponentLink2Description="JLCPCB Part URL", ComponentLink2URL=https://jlcpcb.com/partdetail/C14663, ComponentLink3Description="LCSC Part URL", ComponentLink3URL=https://lcsc.com/product-detail/Multilayer-Ceramic-Capacitors-MLCC---SMD-SMT_YAGEO-YAGEO-CC0603KRX7R9BB104_C14663.html, Manufacturer Part Number=CC0603KRX7R9BB104, RoHS=Yes, Supplier 1=LCSC, Supplier Part Number 1=C14663
C5 C17: "Capacitor, Ceramic (MLCC), 1uF, ±10%, 50V, X5R, ±10%, SMD 0603", Capacitance=1uF, Capacitance @ 1.2V DC Bias=1.044uF, Capacitance @ 1.5V DC Bias=1.027uF, Capacitance @ 1.8V DC Bias=1.007uF, Capacitance @ 1.35V DC Bias=1.035uF, Capacitance @ 1V DC Bias=1.054uF, Capacitance @ 2.5V DC Bias=0.947uF, Capacitance @ 3.3V DC Bias=0.865uF, Capacitance @ 3.7V DC Bias=0.824uF, Capacitance @ 4.2V DC Bias=0.773uF, Capacitance @ 5V DC Bias=0.695uF, Capacitance @ 9V DC Bias=0.410uF, Capacitance @ 12V DC Bias=0.308uF, Capacitance @ 15V DC Bias=0.231uF, Capacitance @ 24V DC Bias=0.130uF, Capacitance @ 36V DC Bias=0.080uF, Capacitance @ 48V DC Bias=0.063uF, JLCPCB Basic Part=Yes, JLCPCB Part Number=C15849, Manufacturer="Samsung Electro-Mechanics", Package Size=0603, Temperature Coefficient=X5R, Temperature Rating="-55°C ~ 85°C", Tolerance=±10%, Voltage Rating=50V, Category="Capacitors - MLCC", ComponentLink1Description=Datasheet, ComponentLink1URL=https://wmsc.lcsc.com/wmsc/upload/file/pdf/v2/lcsc/2304140030_Samsung-Electro-Mechanics-CL10A105KB8NNNC_C15849.pdf, ComponentLink2Description="JLCPCB Part URL", ComponentLink2URL=https://jlcpcb.com/partdetail/C15849, ComponentLink3Description="LCSC Part URL", ComponentLink3URL=https://lcsc.com/product-detail/Multilayer-Ceramic-Capacitors-MLCC---SMD-SMT_Samsung-Electro-Mechanics-Samsung-Electro-Mechanics-CL10A105KB8NNNC_C15849.html, ComponentLink4Description="Samsung Component Library", ComponentLink4URL=https://weblib.samsungsem.com/mlcc/mlcc-ec.do?partNumber=CL10A105KB8NNN, Impedance (0V Bias) @ 1GHz=0.988Ω, Impedance (0V Bias) @ 1kHz=191Ω, Impedance (0V Bias) @ 1MHz=0.208Ω, Impedance (0V Bias) @ 2GHz=2.38Ω, Impedance (0V Bias) @ 5GHz=4.94Ω, Impedance (0V Bias) @ 5kHz=39.1Ω, Impedance (0V Bias) @ 5MHz=0.0293Ω, Impedance (0V Bias) @ 10kHz=19.8Ω, Impedance (0V Bias) @ 10MHz=0.0159Ω, Impedance (0V Bias) @ 50kHz=4.04Ω, Impedance (0V Bias) @ 50MHz=0.0822Ω, Impedance (0V Bias) @ 100Hz=1.84E+03Ω, Impedance (0V Bias) @ 100kHz=2.04Ω, Impedance (0V Bias) @ 100MHz=0.14Ω, Impedance (0V Bias) @ 500Hz=378Ω, Impedance (0V Bias) @ 500kHz=0.416Ω, Impedance (0V Bias) @ 500MHz=0.54Ω, Manufacturer Part Number=CL10A105KB8NNNC, RoHS=Yes, Supplier 1=LCSC, Supplier Part Number 1=C15849
C6 C20: "Capacitor, Ceramic (MLCC), 10uF, ±10%, 10V, X5R, ±10%, SMD 0603", Capacitance=10uF, Capacitance @ 1.2V DC Bias=8.084uF, Capacitance @ 1.5V DC Bias=7.497uF, Capacitance @ 1.8V DC Bias=6.915uF, Capacitance @ 1.35V DC Bias=7.793uF, Capacitance @ 1V DC Bias=8.451uF, Capacitance @ 2.5V DC Bias=5.691uF, Capacitance @ 3.3V DC Bias=4.464uF, Capacitance @ 3.7V DC Bias=3.996uF, Capacitance @ 4.2V DC Bias=3.516uF, Capacitance @ 5V DC Bias=2.897uF, Capacitance @ 9V DC Bias=1.372uF, JLCPCB Basic Part=Yes, JLCPCB Part Number=C19702, Manufacturer="Samsung Electro-Mechanics", Package Size=0603, Temperature Coefficient=X5R, Temperature Rating="-55°C ~ 85°C", Tolerance=±10%, Voltage Rating=10V, Category="Capacitors - MLCC", ComponentLink1Description=Datasheet, ComponentLink1URL=https://wmsc.lcsc.com/wmsc/upload/file/pdf/v2/lcsc/2304140030_Samsung-Electro-Mechanics-CL10A106KP8NNNC_C19702.pdf, ComponentLink2Description="JLCPCB Part URL", ComponentLink2URL=https://jlcpcb.com/partdetail/C19702, ComponentLink3Description="LCSC Part URL", ComponentLink3URL=https://lcsc.com/product-detail/Multilayer-Ceramic-Capacitors-MLCC---SMD-SMT_Samsung-Electro-Mechanics-Samsung-Electro-Mechanics-CL10A106KP8NNNC_C19702.html, ComponentLink4Description="Samsung Component Library", ComponentLink4URL=https://weblib.samsungsem.com/mlcc/mlcc-ec.do?partNumber=CL10A106KP8NNN, Impedance (0V Bias) @ 1GHz=0.788Ω, Impedance (0V Bias) @ 1kHz=22.6Ω, Impedance (0V Bias) @ 1MHz=0.0217Ω, Impedance (0V Bias) @ 2GHz=1.8Ω, Impedance (0V Bias) @ 5GHz=3.33Ω, Impedance (0V Bias) @ 5kHz=4.64Ω, Impedance (0V Bias) @ 5MHz=0.0144Ω, Impedance (0V Bias) @ 10kHz=2.35Ω, Impedance (0V Bias) @ 10MHz=0.0227Ω, Impedance (0V Bias) @ 50kHz=0.481Ω, Impedance (0V Bias) @ 50MHz=0.0729Ω, Impedance (0V Bias) @ 100Hz=217Ω, Impedance (0V Bias) @ 100kHz=0.243Ω, Impedance (0V Bias) @ 100MHz=0.123Ω, Impedance (0V Bias) @ 500Hz=44.6Ω, Impedance (0V Bias) @ 500kHz=0.0484Ω, Impedance (0V Bias) @ 500MHz=0.439Ω, Impedance (10V Bias) @ 1GHz=0.786Ω, Impedance (10V Bias) @ 1kHz=162Ω, Impedance (10V Bias) @ 1MHz=0.161Ω, Impedance (10V Bias) @ 2GHz=1.77Ω, Impedance (10V Bias) @ 5GHz=3.28Ω, Impedance (10V Bias) @ 5kHz=32.7Ω, Impedance (10V Bias) @ 5MHz=0.0215Ω, Impedance (10V Bias) @ 10kHz=16.4Ω, Impedance (10V Bias) @ 10MHz=0.0228Ω, Impedance (10V Bias) @ 50kHz=3.3Ω, Impedance (10V Bias) @ 50MHz=0.0759Ω, Impedance (10V Bias) @ 100Hz=1.6E+03Ω, Impedance (10V Bias) @ 100kHz=1.66Ω, Impedance (10V Bias) @ 100MHz=0.123Ω, Impedance (10V Bias) @ 500Hz=323Ω, Impedance (10V Bias) @ 500kHz=0.331Ω, Impedance (10V Bias) @ 500MHz=0.443Ω, Manufacturer Part Number=CL10A106KP8NNNC, RoHS=Yes, Supplier 1=LCSC, Supplier Part Number 1=C19702
C13: "Capacitor, Ceramic (MLCC), 47nF, ±10%, 50V, X7R, ±10%, SMD 0603", Capacitance=47nF, Capacitance @ 1.2V DC Bias=47.280nF, Capacitance @ 1.5V DC Bias=47.357nF, Capacitance @ 1.8V DC Bias=47.426nF, Capacitance @ 1.35V DC Bias=47.319nF, Capacitance @ 1V DC Bias=47.231nF, Capacitance @ 2.5V DC Bias=47.515nF, Capacitance @ 3.3V DC Bias=47.532nF, Capacitance @ 3.7V DC Bias=47.514nF, Capacitance @ 4.2V DC Bias=47.475nF, Capacitance @ 5V DC Bias=47.375nF, Capacitance @ 9V DC Bias=46.446nF, Capacitance @ 12V DC Bias=45.320nF, Capacitance @ 15V DC Bias=44.061nF, Capacitance @ 24V DC Bias=39.258nF, Capacitance @ 36V DC Bias=31.412nF, Capacitance @ 48V DC Bias=23.014nF, JLCPCB Basic Part=Yes, JLCPCB Part Number=C1622, Manufacturer="Samsung Electro-Mechanics", Package Size=0603, Temperature Coefficient=X7R, Temperature Rating="-55°C ~ 125°C", Tolerance=±10%, Voltage Rating=50V, Category="Capacitors - MLCC", ComponentLink1Description=Datasheet, ComponentLink1URL=https://wmsc.lcsc.com/wmsc/upload/file/pdf/v2/lcsc/2304140030_Samsung-Electro-Mechanics-CL10B473KB8NNNC_C1622.pdf, ComponentLink2Description="JLCPCB Part URL", ComponentLink2URL=https://jlcpcb.com/partdetail/C1622, ComponentLink3Description="LCSC Part URL", ComponentLink3URL=https://lcsc.com/product-detail/Multilayer-Ceramic-Capacitors-MLCC---SMD-SMT_Samsung-Electro-Mechanics-Samsung-Electro-Mechanics-CL10B473KB8NNNC_C1622.html, ComponentLink4Description="Samsung Component Library", ComponentLink4URL=https://weblib.samsungsem.com/mlcc/mlcc-ec.do?partNumber=CL10B473KB8NNN, Impedance (0V Bias) @ 1GHz=1.81Ω, Impedance (0V Bias) @ 1kHz=3.4E+03Ω, Impedance (0V Bias) @ 1MHz=3.65Ω, Impedance (0V Bias) @ 2GHz=4.68Ω, Impedance (0V Bias) @ 5GHz=10.5Ω, Impedance (0V Bias) @ 5kHz=693Ω, Impedance (0V Bias) @ 5MHz=0.738Ω, Impedance (0V Bias) @ 10kHz=349Ω, Impedance (0V Bias) @ 10MHz=0.364Ω, Impedance (0V Bias) @ 50kHz=71.1Ω, Impedance (0V Bias) @ 50MHz=0.0607Ω, Impedance (0V Bias) @ 100Hz=3.3E+04Ω, Impedance (0V Bias) @ 100kHz=35.7Ω, Impedance (0V Bias) @ 100MHz=0.192Ω, Impedance (0V Bias) @ 500Hz=6.73E+03Ω, Impedance (0V Bias) @ 500kHz=7.27Ω, Impedance (0V Bias) @ 500MHz=0.928Ω, Manufacturer Part Number=CL10B473KB8NNNC, RoHS=Yes, Supplier 1=LCSC, Supplier Part Number 1=C1622
C18: library part CMP-02414-000016-1, "TANTALUM CAP 10000000 PF 10%", Capacitance=10uF, Case Code (Imperial)=1411, Case Code (Metric)=3528, Case/Package=Molded, Dielectric Material=Tantalum, ESR (Equivalent Series Resistance)=2.3R, Leakage Current=2.5uA, Max Operating Temperature=125°C, Min Operating Temperature=-55°C, Package Quantity=2000, Ripple Current=190mA, Tolerance=10%, Voltage Rating=25V, Voltage Rating (DC)=200kV, Depth=2.8mm, Dissipation Factor=6%, Height=2.1mm, Lead Free="Lead Free", Length=3.5mm, Packaging="Tape and Reel", Polarity=Polar, Radiation Hardening=No, RoHS Compliant=Yes, Series=293D, Termination=SMD/SMT, Weight=0.002293oz, Width=1.9mm
C22 C23 C25: library part CC0603KRX7R9BB105, "CAP 1uF SM0603 X7R 50V YAGEO CC2", Manufacturer=Yageo, Manufacturer Part Number=CC0603KRX7R9BB183, Package=0603, Supplier Part Number 1=3019743, Tolerance (%)=10, Voltage Rating (Volts)=50, Category=Capacitor, ComponentLink1Description="Manufacturer Website", ComponentLink1URL=http://www.yageo.com, Supplier 1=Farnell, Supplier 2=Digi-Key
D1: "30V SCHOTTKY", Manufacturer="On Semiconductor", ComponentLink1Description="Manufacturer URL", ComponentLink1URL=http://www.onsemi.com/, ComponentLink2Description=Datasheet, ComponentLink2URL=http://www.onsemi.cn/pub_link/Collateral/MMBD452LT1-D.PDF, ComponentLink3Description="Package Specification", ComponentLink3URL=http://www.onsemi.cn/pub_link/Collateral/318-08.PDF, Configuration=Dual, DatasheetVersion="Rev. 4", Manufacturer Part Number=MMBD452LT1G, Mounting Technology="Surface Mount", PackageDescription="3-Pin Small Outline Transistor, Body 2.92 x 1.3 mm, Pitch 0.95 mm", PackageReference=SOT-23-3-318-08, PackageVersion="Rev. AP, 11/2009", Packing="Tape and Reel", PartNumber=MMBD452LT1G, RoHS=TRUE
D2 D3: library part CMP-207942-000006-2, "LED RGB CLEAR 4SMD BOTTOM ENTRY", Color="Blue, Green, Red", Forward Current=40mA, Forward Voltage=2V, Max Operating Temperature=85°C, Max Reverse Voltage (DC)=5V, Min Operating Temperature=-40°C, Power Dissipation=48mW, Dominant Wavelength=525nm, Height=800µm, Length=3.2mm, Luminous Intensity=70mcd, NexarPartId=82270997, Packaging="Tape and Reel", Peak Wavelength=468nm, Reverse Voltage=5V, RoHS=Compliant, Viewing Angle=120°, Width=1.2mm
D4: "Reverse Polarity Protection", Capacitance @ Vr, F=-, Current - Average Rectified (Io)=15A, Manufacturer="Diodes Incorporated", Operating Temperature - Junction="-65°C ~ 150°C", Package / Case="PowerDI™ 5", Supplier Device Package=PowerDI®5, Supplier Part Number 1=SBRT15U50SP5-13DICT-ND, Category="Discrete Semiconductor Products", ComponentLink1Description=https://media.digikey.com/pdf/Data%20Sheets/Diodes%20PDFs/SBRT15U50SP5.pdf, ComponentLink1URL=https://media.digikey.com/pdf/Data%20Sheets/Diodes%20PDFs/SBRT15U50SP5.pdf, Diode Type="Super Barrier", Manufacturer Part Number=SBRT15U50SP5-13, Mounting Type="Surface Mount", Packaging="Cut Tape (CT)", Part Status=Active, Pricing 1="1=0.93, 10=0.823, 100=0.6306, 500=0.49852, 1000=0.39882 (USD)", RoHS="RoHS Compliant", Speed="Fast Recovery =< 500ns, > 200mA (Io)", Stock 1=12134, Supplier 1=Digi-Key
D5: library part CMP-2000-06624-2, "LED BLUE CLEAR CHIP SMD", Case Code (Imperial)=0603, Case Code (Metric)=1608, Color=Blue, Forward Current=20mA, Forward Voltage=2.8V, Lens Color=Colorless, Max Operating Temperature=80°C, Min Operating Temperature=-20°C, Package Quantity=1, Power Dissipation=76mW, Reverse Voltage=5V, Test Current=5mA, Case/Package=0603, Depth=0.8mm, Dominant Wavelength=475nm, Height=0.35mm, Illumination Color=Blue, Lead Free="Lead Free", Length=1.6mm, Lens Style=Diffused, Lens Transparency=Clear, Luminous Intensity=15mcd, Mount="Surface Mount", Number of Elements=1, Number of LEDs=1, Number of Pins=2, Packaging="Tape and Reel", Radiation Hardening=No, RoHS Compliant=Yes, Viewing Angle=130°, Width=0.8mm
D6: library part CMP-2000-07090-1, "SMAJ Transient Voltage Suppressor Diode Series, 3.5 V, -55 to 150 degC, 2-Pin SMA, RoHS, Tape and Reel", Capacitance @ Frequency=-, Current - Peak Pulse (10/1000µs)=43.5A, Manufacturer=Bourns, Operating Temperature=-55°C~150°C(TJ), Package / Case=DO-214AC,SMA, Package Description="2-Pin Surface Mount Device, Body 4.315 x 2.605 mm", Package Reference=SMA-2, Power - Peak Pulse=400W, Power Line Protection=No, Standard Package=1, Supplier Device Package=SMA(DO-214AC), Voltage - Breakdown (Min)=6.4V, Voltage - Clamping (Max) @ Ipp=9.2V, Voltage - Reverse Standoff (Typ)=5V, Applications=GeneralPurpose, Bidirectional Channels=-, Catalog Drawings=SMAJSeriesFootprintSMAJ,SMBJSeries, Category=CircuitProtection, Datasheet URL=https://datasheet.ciiva.com/25624/0900766b8112213b-25624680.pdf, Datasheet Version=08/2012, EDA / CAD Models=DownloadfromAcceleratedDesigns, Family=TVS-Diodes, Featured Product=SMAJ/SMBJ/SMCJ/SMLJDiscreteTVSDiodes, Manufacturer URL=http://www.bourns.com/, Mounting Technology=SurfaceMount, Mounting Type=SurfaceMount, Online Catalog=SMAJSeries, Other Names=SMAJ5.0ABDKR, Packaging=Digi-Reel®, RoHS Information=SMAJSeriesMaterialDeclaration, Series=SMAJ, Type=Zener, Unidirectional Channels=1
F1: library part 0466.500NR, "500mA Fuse", Fuse Current=0.5A, Fuse Interrupt Ac Current=50A, Fuse Voltage Drop=158.47mV, Manufacturer="Littelfuse Inc", Max Fuse Ac Voltage=63V, Package=0466, Resistance=0.248Ω, Temperature="-55°C to +90°C", Temperature Range High=+90°C, Temperature Range Low=-55°C, Automotive=No, Category=Fuse, ComponentLink2Description=Datasheet, ComponentLink2URL=https://www.littelfuse.com/~/media/electronics/datasheets/fuses/littelfuse_fuse_466_datasheet.pdf.pdf, Device Class L1="Circuit Protection", Device Class L2=Fuses, Device Class L3=unset, Digikey Description="FUSE BOARD MOUNT 500MA 63VAC/VDC", Fuse Blow Speed=Fast, Fuse I2T=0.006A2Sec, Fuse Interrupt Dc Current=50A, Height=0.66mm, Lead Free=Yes, Manufacturer Part Number=0466.500NR, Max Fuse Dc Voltage=63V, Mouser Description="SMD Fuse 0.5 A Fast-Blow, 466 1206", Octopart=https://octopart.com/0466.500nr-littelfuse-566004, RoHS=TRUE, Voltage Rating=63V
J1: library part CMP-15126-126517171-1, "20021121-00010C4LF Conn Unshrouded Header HDR 10 POS 1.27mm Solder ST Top Entry SMD Minitek127® T/R", Color=Black, Contact Resistance=30mΩ, Current Rating=1A, Insulation Resistance=100MΩ, Max Operating Temperature=85°C, Max Voltage Rating (AC)=125V, Min Operating Temperature=-55°C, Connector Type="Header, Male Pin", Contact Material="Copper, Gold", Contact Mating Length=3.048mm, Contact Plating=Gold, Depth=3.4mm, Gender=Male, Height=4.8mm, Housing Color=Black, Housing Material=Thermoplastic, Length=6.35mm, Mating Post Length=3.05mm, Mount="Surface Mount", NexarPartId=126517171, Number of Contacts=10, Number of Pins=10, Number of Positions=10, Number of Rows=2, Orientation=Straight, Pitch=1.27mm, Radiation Hardening=No, REACH SVHC="No SVHC", RoHS=Compliant, Row Spacing=1.27mm, Stack Height=3mm, Termination=Solder, Voltage Rating=125V
J2: library part CMP-04767-000013-1, "CONN RCPT TYPE C 24POS SMD RA"
R1 R2 R3 R4: "Resistor, 10kΩ, ±1%, 100mW, 75V, ±100ppm/℃, -55℃~+155℃, SMD 0603", JLCPCB Basic Part=Yes, JLCPCB Part Number=C25804, Manufacturer=Uniroyal, Package Size=0603, Power Rating=100mW, Resistance=10kΩ, Temperature Coefficient=±100ppm/℃, Temperature Rating=-55℃~+155℃, Tolerance=±1%, Voltage Rating=75V, Category=Resistors, ComponentLink1Description=Datasheet, ComponentLink1URL=https://wmsc.lcsc.com/wmsc/upload/file/pdf/v2/lcsc/2206010045_UNI-ROYAL-Uniroyal-Elec-0603WAF1002T5E_C25804.pdf, ComponentLink2Description="JLCPCB Part URL", ComponentLink2URL=https://jlcpcb.com/partdetail/C25804, Manufacturer Part Number=0603WAF1002T5E, Supplier 1=LCSC, Supplier Part Number 1=C25804
R5: "Resistor, 2.2kΩ, ±1%, 100mW, 75V, ±100ppm/℃, -55℃~+155℃, SMD 0603", JLCPCB Basic Part=Yes, JLCPCB Part Number=C4190, Manufacturer=Uniroyal, Package Size=0603, Power Rating=100mW, Resistance=2.2kΩ, Temperature Coefficient=±100ppm/℃, Temperature Rating=-55℃~+155℃, Tolerance=±1%, Voltage Rating=75V, Category=Resistors, ComponentLink1Description=Datasheet, ComponentLink1URL=https://wmsc.lcsc.com/wmsc/upload/file/pdf/v2/lcsc/2206010230_UNI-ROYAL-Uniroyal-Elec-0603WAF2201T5E_C4190.pdf, ComponentLink2Description="JLCPCB Part URL", ComponentLink2URL=https://jlcpcb.com/partdetail/C4190, Manufacturer Part Number=0603WAF2201T5E, Supplier 1=LCSC, Supplier Part Number 1=C4190
R6 R8 R9: library part RC0603FR-0710KL, "RES 10K SM0603 YAGEO RC_L", Manufacturer=Yageo, Package=0603, Power (Watts)=0.1, Resistance (Ohms)=10000, Supplier Part Number 1=9238603, Tolerance (%)=1, Category=Resistor, ComponentLink1Description="Manufacturer Website", ComponentLink1URL=http://www.yageo.com, Manufacturer Part Number=RC0603FR-0710KL, Supplier 1=Farnell, Supplier 2=Digi-Key, Supplier Part Number 2=311-10.0KHRCT-ND
R10 R11: library part RC0603FR-072K2L, "RES 2K2 SM0603 YAGEO RC_L", Manufacturer=Yageo, Package=0603, Power (Watts)=0.1, Resistance (Ohms)=2200, Supplier Part Number 1=9238522, Tolerance (%)=1, Category=Resistor, ComponentLink1Description="Manufacturer Website", ComponentLink1URL=http://www.yageo.com, Manufacturer Part Number=RC0603FR-072K2L, Supplier 1=Farnell, Supplier 2=Digi-Key, Supplier Part Number 2=311-2.20KHRCT-ND
R12 R14 R15 R16 R17 R18 R19: "Resistor, 100Ω, ±1%, 100mW, 75V, ±200ppm/℃, -55℃~+155℃, SMD 0603", JLCPCB Basic Part=Yes, JLCPCB Part Number=C22775, Manufacturer=Uniroyal, Package Size=0603, Power Rating=100mW, Resistance=100Ω, Temperature Coefficient=±200ppm/℃, Temperature Rating=-55℃~+155℃, Tolerance=±1%, Voltage Rating=75V, Category=Resistors, ComponentLink1Description=Datasheet, ComponentLink1URL=https://wmsc.lcsc.com/wmsc/upload/file/pdf/v2/lcsc/2206010130_UNI-ROYAL-Uniroyal-Elec-0603WAF1000T5E_C22775.pdf, ComponentLink2Description="JLCPCB Part URL", ComponentLink2URL=https://jlcpcb.com/partdetail/C22775, Manufacturer Part Number=0603WAF1000T5E, Supplier 1=LCSC, Supplier Part Number 1=C22775
R13: "Resistor, 2kΩ, ±1%, 100mW, 75V, ±100ppm/℃, -55℃~+155℃, SMD 0603", JLCPCB Basic Part=Yes, JLCPCB Part Number=C22975, Manufacturer=Uniroyal, Package Size=0603, Power Rating=100mW, Resistance=2kΩ, Temperature Coefficient=±100ppm/℃, Temperature Rating=-55℃~+155℃, Tolerance=±1%, Voltage Rating=75V, Category=Resistors, ComponentLink1Description=Datasheet, ComponentLink1URL=https://wmsc.lcsc.com/wmsc/upload/file/pdf/v2/lcsc/2206010116_UNI-ROYAL-Uniroyal-Elec-0603WAF2001T5E_C22975.pdf, ComponentLink2Description="JLCPCB Part URL", ComponentLink2URL=https://jlcpcb.com/partdetail/C22975, Manufacturer Part Number=0603WAF2001T5E, Supplier 1=LCSC, Supplier Part Number 1=C22975
SW1: library part CMP-07427-000009-1, "SWITCH TACTILE SPST-NO 0.1A 16V", Case/Package=SMD/SMT, Current Rating=100mA, Max Operating Temperature=125°C, Max Voltage Rating (DC)=16V, Min Operating Temperature=-55°C, Operating Force=2.94N, Package Quantity=1, Actuator Material=Rubber, Actuator Type=Standard, Contact Material=Gold, Contact Plating=Silver, Depth=5mm, Illumination Type=Non-Illuminated, Length=5mm, Max Current Rating=100mA, Mechanical Life=100000Cycles, Mount="Surface Mount", Orientation=Straight, Packaging="Tape and Reel", RoHS Compliant=Yes, Series=7914, Switch Function=Off-Mom, Termination=J-Hook, Throw Configuration=SPST, Voltage Rating (DC)=16V
SW2: library part CMP-10038-000010-1, "SWITCH SLIDE SPDT 300MA 6V", Current Rating=300mA, Max Operating Temperature=85°C, Min Operating Temperature=-40°C, Voltage Rating (DC)=6V, Actuator Length=2mm, Actuator Material=Nylon, Actuator Type=Standard, Contact Material="Copper Alloy", Contact Plating=Silver, Electrical Life=5000Cycles, Mount="Surface Mount", Packaging="Cut Tape", Switch Function=On-On, Switch Travel=2mm, Throw Configuration=SPDT
U1: library part STM32F4xxR2_minimalist, "ARM® Cortex®-M4 STM32F4 Microcontroller IC 32-Bit 100MHz 1MB (1M x 8) FLASH 64-LQFP (10x10)", Manufacturer_Part_Number=stm32f4xxr2, Supplier Part Number 1=497-17011-ND, C="Copyright (C) 2016 Accelerated Designs. All rights reserved", Copyright="Copyright (C) 2016 Accelerated Designs. All rights reserved", RefDes=RefDes, Supplier 1=Digi-Key, Type=Type, Vendor=STMicroelectronics
U2: "IC OPAMP GP 2 CIRCUIT 8SOIC", Manufacturer="Texas Instruments", Manufacturer Part Number=OPA2991IDR
U3: library part CMP-0133-00143-2, "IC CONTROLLR LI-ION 4.2V SOT23-5", Case/Package=SOT-23, Drain to Source Resistance=350mR, Max Charge Current=500mA, Max Input Voltage=6V, Max Operating Temperature=85°C, Max Output Voltage=4.5V, Max Power Dissipation=1.54W, Min Operating Temperature=-40°C, Min Output Voltage=4.168V, Min Supply Voltage=3.75V, Output Voltage=4.2V, Voltage Rating=4.534V, Contact Plating=Tin, Height=0.051inch, Lead Free="Lead Free", Length=0.122inch, Max Supply Voltage=6V, Mount="Surface Mount", Number of Cells=1, Number Of Channels=1, Number of Outputs=1, Number of Pins=5, Output Current=500mA, Packaging="Tape and Reel", Radiation Hardening=No, REACH SVHC="No SVHC", Termination=SMD/SMT, Weight=0.00709oz, Width=0.071inch
U4: library part CMP-06324-000027-1, "IC REG LINEAR 3.3V 500MA SOT23-5", Case/Package=SOT-23-5, Dropout Voltage=350mV, Max Input Voltage=12V, Max Operating Temperature=125°C, Min Input Voltage=2.5V, Min Operating Temperature=-40°C, Nominal Output Voltage=3.3V, Output Current=500mA, Lead Free="Lead Free", Mount="Surface Mount", Number of Pins=5, Number of Regulators=1, Output Type=Fixed, Output Voltage=3.3V, Packaging="Cut Tape", REACH SVHC="No SVHC"
U5 U6 U7: library part CMP-04915-000035-1, "IC MOTOR DRIVER 2V-5.2V 10VSSOP", Case/Package=VSSOP, Max Operating Temperature=105°C, Max Supply Voltage=5.2V, Min Operating Temperature=-40°C, Min Supply Voltage=2V, Quiescent Current=500uA, Interface=I2C, Lead Free="Lead Free", Logic Function="AND GATE", Mount="Surface Mount", Number of Pins=10, Packaging="Cut Tape", REACH SVHC="No SVHC", RoHS Compliant=Yes
X1: "CRYSTAL 25.0000MHZ 10PF SMD", Case/Package=SMD/SMT, ESR (Equivalent Series Resistance)=60R, Frequency=25MHz, Frequency Stability=10ppm, Load Capacitance=10pF, Manufacturer 1=TXC, Max Operating Temperature=70°C, Min Operating Temperature=-20°C, Package Quantity=3000, Supplier Part Number 1=887-1326-1-ND, ComponentLink1Description=https://datasheet.ciiva.com/26918/getdatasheetpartid-757227-26918816.pdf, ComponentLink1URL=https://datasheet.ciiva.com/26918/getdatasheetpartid-757227-26918816.pdf, ComponentLink2Description=https://datasheet.ciiva.com/856/7m-accuracy-856022.pdf, ComponentLink2URL=https://datasheet.ciiva.com/856/7m-accuracy-856022.pdf, ComponentLink3Description=https://datasheet.ciiva.com/22658/1794111-22658486.pdf, ComponentLink3URL=https://datasheet.ciiva.com/22658/1794111-22658486.pdf, ComponentLink4Description=https://datasheet.ciiva.com/856/7m-accuracy-856023.pdf, ComponentLink4URL=https://datasheet.ciiva.com/856/7m-accuracy-856023.pdf, ComponentLink5Description=https://datasheet.ciiva.com/856/7m-accuracy-856024.pdf, ComponentLink5URL=https://datasheet.ciiva.com/856/7m-accuracy-856024.pdf, ComponentLink6Description=https://datasheet.ciiva.com/4946/7m-11184-4946126.pdf, ComponentLink6URL=https://datasheet.ciiva.com/4946/7m-11184-4946126.pdf, ComponentLink7Description=https://datasheet.ciiva.com/28498/1794111-28498878.pdf, ComponentLink7URL=https://datasheet.ciiva.com/28498/1794111-28498878.pdf, Depth=2.5mm, Frequency Tolerance=10ppm, Height=0.031inch, Length=3.2mm, Manufacturer Part Number 1=7M-25.000MEEQ-T, Mount="Surface Mount", Number of Pins=4, Packaging="Tape and Reel", Pricing 1="1=1.27, 10=1.209, 50=1.1812, 100=1.0125, 500=0.9844, 1000=0.8297 (USD)", REACH SVHC="No SVHC", Stock 1=17097, Supplier 1=Digi-Key, Termination=SMD/SMT, Tolerance=10ppm, Width=0.098inch

## Free pads (board coordinates)
  round 216.54 hole 118.11: 1(3950,2965) 1(4765,4055)

## Via types
v1: diameter 20, hole 10, Top Layer to Bottom Layer, tented both sides, 66 vias
v2: diameter 40, hole 30, Top Layer to Bottom Layer, 6 vias
v3: diameter 35, hole 30, Top Layer to Bottom Layer, 2 vias

## Nets (pads, with @x,y where several pads share a name; then routed paths per layer and width w, separated by ;. In a path a pad name is that pad's centre, name@x,y a point inside that pad or via, vN(x,y) a via of type N, cw(c..) or ccw(c..) an arc to the next point about the centre after c; other vN are vias at no path point)
3V3_RAW: C16.2 F1.1 U3.3 | length 432.9
  Top Layer w10: v3(4120,3375) 4148.5,3375 4155,3381.5 4175.05,3381.5 U3.3 4222.6,3292.6 4231.8,3283.4 4231.87,3283.4 4244.98,3270.29 4244.98,3267.73 4250,3262.71 v1(4250,3260) ; v1(4365,3250) 4374.49,3250 4406.99,3282.5 F1.1@4455,3282.5
  Bottom Layer w10: v1(4250,3260) 4354.14,3260 4364.14,3250 v1(4365,3250)
BATT_GND: C1.1 C2.1 C3.1 C4.1 C5.1 C6.1 C7.1 C8.1 C9.1 C10.1 C11.1 C12.1 C13.1 C14.1 C15.1 C16.1 C17.1 C18.1 C19.1 C20.1 C21.1 C22.2 C23.2 C24.1 C25.2 D1.1 D5.1 D6.1 J1.3 J1.5 J1.9 J2.C6 pad.1 R1.2 R2.2 R3.2 R6.1 R13.1 SW1.2_1- U1.12 U1.18 U1.31 U1.47 U1.63 U2.4 U3.2 U4.2 U5.8 U6.8 U7.8 X1.2 X1.4 | length 4208.2
  Top Layer w10: v1(3870,3810) 3923.8,3863.8 3923.8,3884.24 3930.25,3890.69 3976.76,3890.69 3983.2,3884.24 3983.2,3860 C12.1 ; C13.1 3948.5,3436.65 D6.1 3895,3380.97 4001.47,3380.97 4072.6,3452.09 D1.1 4093.23,3435 v1@4110,3435 ; v1(4025,3650) 4026.71,3651.71 4058.98,3651.71 4071.67,3639.01 4071.67,3609.77 4077.53,3603.91 U2.4 ; v3(4120,3315) 4151.5,3315 4155,3318.5 v1(4155,3280) C15.1 ; C11.1 C10.1 4213.5,3761.5 v1(4235,3740) ; v1(4235,4010) 4235,3982.56 R1.2 ; v1(4260,3290) U3.2 ; v1(4300,3570) C7.1 C6.1 C3.1 ; v1(4325,3230) 4337.56,3217.44 R13.1 4367.56,3225 C20.1@4423.5,3225 ; v1(4383.55,3729) 4400,3745.45 SW1.2_1- SW1.2_1-@4410,3790 ; R6.1 4451.99,3317.44 v1(4458.55,3324) ; R2.2 4451.22,3476.22 4483.52,3476.22 4492.29,3485 v1(4495,3485) ; v1@4470,3595 4483.5,3608.5 C8.1 C9.1 C5.1 C4.1 4502.91,3809.4 v1(4502.91,3823.77) ; v1(4570,3005) 4626.55,3005 4668.04,2963.5 C19.1 ; v1(4645,3125) 4647.71,3125 4654.2,3131.5 C17.1 4713.58,3112.91 C18.1
  Bottom Layer w10: v1@3910,4110 J1.3 J1.5 3984.04,4041.77 3984.04,3989.97 3990.48,3983.53 4029.52,3983.53 4035.96,3989.97 4035.96,4041.77 J1.9 ; v1(4025,3650) 4061.06,3650 4073.6,3637.46 4090.31,3637.46 4100.65,3647.81 4100.65,3655.4 U1.47 ; J2.C6@4062.6,3390.98 4069.38,3390.98 v1(4112.88,3434.49) ; R3.2 4060,4132.44 J1.9 ; D5.1 4068.7,4050.47 J1.9 ; v1(4155,3280) 4188.62,3280 C25.2 ; v1(4235,4010) 4236.91,4008.09 4252.87,4008.09 U1.63 ; v1(4260,3290) 4221.38,3290 C25.2 ; U7.8 4313.2,3184.09 4313.2,3213.45 4290.16,3236.5 ; C23.2 4435.93,3301.38 v1(4458.55,3324) ; U1.31 4436.97,3462.08 4442.89,3462.08 4446.96,3458.01 4467.15,3458.01 4494.14,3485 v1(4495,3485) ; v1(4463.55,4014) 4464,4014 C1.1 4492.73,4041.06 X1.4 ; U6.8 4526.79,3184.08 4526.79,3224.65 4538.64,3236.5 ; v1(4555,3285) 4556.06,3286.06 4580,3286.06 4595.31,3301.38 C22.2 ; U1.12 4583.81,3856.38 4631.12,3856.38 4631.41,3856.09 4642.36,3856.09 4683.55,3897.28 v1(4683.55,3899) ; U1.18 4635,3625.95 v1(4635,3625) ; C14.1 4538.64,3236.5 ; v1(4645,3125) 4718.27,3125 4731.7,3138.43 4731.7,3178.99 U5.8 ; X1.2 4682.27,3946.17 C2.1 4682.97,3936.57 v1@4682.97,3899 ; C25.2 C24.1 4290.16,3236.5 ; 4290.16,3236.5 4295,3236.5 4300,3231.5 4323.5,3231.5 v1(4325,3230) 4326,3229 4373.7,3229 4381.19,3236.5 C21.1 4538.64,3236.5
  other v1: 4470,3590 3909.09,4110.2
BOOT0: R1.1 U1.60 | length 95.4
  Top Layer w10: R1.1 4240,3910 v1(4265,3885)
  Bottom Layer w10: U1.60 4243.64,3932.38 4265,3911.02 v1(4265,3885)
BOOT1: R2.1 U1.28 | length 97
  Top Layer w10: v1(4440,3570) 4440,3551.34 4448.78,3542.56 R2.1
  Bottom Layer w10: v1(4440,3570) 4440,3543.98 4466.36,3517.62 U1.28
CHARGE_STATUS: R6.2 R9.1 U1.33 U3.1 | length 323.4
  Top Layer w10: U3.1 4297.4,3369.97 4283.37,3384 4276.3,3384 4264,3396.3 4264,3424 v1(4265,3425) 4266,3426 4293.85,3426 4325,3394.86 4325,3393.42 4330.86,3387.56 R9.1 4405,3387.56 R6.2
  Bottom Layer w10: v1(4265,3425) 4265,3425.6 4299.32,3459.93 U1.33
CHARGE_STATUS_B: R19.2 U1.36 | length 892.8
  Top Layer w10: R19.2@4138.95,2900.32 4151.34,2912.72 4151.66,2912.72 4316,3077.05 4316,3127.84 4296.77,3147.07 4248.23,3147.07 4229,3166.3 4229,3183.7 4271,3225.7 4271,3264.14 4292.77,3285.92 4300.53,3285.92 4318.28,3303.67 4318.28,3371.72 v1(4285,3405)
  Bottom Layer w10: U1.36 4208,3452.73 4208,3410.86 4217.94,3400.91 4274.14,3400.91 4276.31,3403.09 4283.09,3403.09 v1(4285,3405)
CHARGE_STATUS_G: R18.2 U1.35 | length 817.3
  Top Layer w10: 4017.44,3135 4007.51,3125.06 3914.89,3125.06 3842.66,3197.29 3842.66,3256.41 3933.41,3347.15 4007.15,3347.15 4073.49,3413.49 4121.58,3413.49 4130,3421.91 4203.21,3421.91 4203.3,3422 4220.7,3422 4220.79,3421.91 v1(4238.09,3421.91)
  Bottom Layer w10: v1(4238.09,3421.91) 4238.09,3424.62 4234,3428.71 4234,3453.7 4246.3,3466 4247.7,3466 4270.07,3488.37 U1.35
CHARGE_STATUS_R: R17.2 U1.21 | length 1398
  Top Layer w10: v1(4169,3081) 4169,3081.08 4186.64,3098.72 R17.2@4186.64,3130
  Bottom Layer w10: v1@4166,3083 4168,3081 4373.77,3081 4375.77,3079 4772,3079 4882,3189 4882,3333 4617.8,3597.2 4586.15,3597.2 4582.08,3601.27 4576.17,3601.27 U1.21
MCU_STATUS_SIG: R14.1 U1.56 | length 285.9
  Top Layer w10: v1@4210,4039.39 4210,3855.86 4220,3845.86 v1(4220,3845)
  Bottom Layer w10: R14.1@4175,4042.44 4212.56,4042.44 v1(4215,4040) ; U1.56 4187.97,3877.03 v1(4220,3845)
MODE_IND_B: R16.2 U1.43 | length 795.2
  Top Layer w10: v1(4250,3630) 4250,3655.6 4299.4,3705 4400.6,3705 4436,3740.4 4436,3796.44 4481,3841.44 4481,3910.81 4465,3926.81 4465,3985.75 4484.55,4005.3 4484.55,4080.15 4465,4099.7 R16.2@4465,4145
  Bottom Layer w10: U1.43 4190.4,3630 v1(4250,3630)
MODE_IND_G: R15.2 U1.42 | length 609.8
  Top Layer w10: R15.2 4230,4054.7 4257.82,4026.87 4257.82,4026.69 4259.55,4024.97 4259.55,4010.45 4267.22,4002.78 4267.22,3912.48 4286,3893.7 4286,3890.86 4295,3881.86 v1(4295,3880)
  Bottom Layer w10: U1.42 4175.46,3585.81 4190.79,3601.13 4193.17,3601.13 4197.87,3605.83 4255.83,3605.83 4295,3645 v1(4295,3880)
MODE_IND_R: R12.2 U1.41 | length 1316.4
  Top Layer w10: v1(4250,3570) 4250,3532.55 4274.26,3508.3 4483.73,3508.3 4576.2,3600.76 4576.2,3814.24 4576.2,3958.8 4540,3995 4540,4112.49 4470.27,4182.22 4329.84,4182.22 4309.83,4162.2 R12.2@4277.2,4162.2
  Bottom Layer w10: U1.41 4205.91,3589.83 4230.17,3589.83 v1(4250,3570)
MODE_TOGGLE_COND: U1.2 U2.6 U2.7 | length 602.3
  Top Layer w10: U2.7 U2.6 4050,3770 v1(4025,3745) ; v1(4260,3855) 4313.92,3855 4393.09,3934.16 4393.09,3943.09 v1(4395,3945)
  Bottom Layer w10: v1(4025,3745) 4150,3745 v1(4260,3855) ; v1(4395,3945) 4395,3945.95 U1.2
MOTOR_A+: U5.7 | length 133.5
  Bottom Layer w10: U5.7 4754.68,3207.06 4757.98,3210.36 4757.98,3212.83 4780.15,3235 4814.09,3235 4839.09,3210 v2(4840,3210)
MOTOR_A-: U5.9 | length 211.9
  Bottom Layer w10: U5.9 4715.31,3230.31 4809,3324 4839,3324 v2(4840,3325)
MOTOR_B+: U6.7 | length 80.7
  Bottom Layer w10: U6.7 4545.41,3181.57 4545.41,3137.71 4565,3118.12 v2(4565,3110)
MOTOR_B-: U6.9 | length 71.6
  Bottom Layer w10: v2(4495,3115) 4495,3120.95 4505.31,3131.27 U6.9
MOTOR_C+: U7.7 | length 56.6
  Bottom Layer w10: U7.7 4335.41,3181.57 4335.41,3139.59 v2@4345,3130
  other v2: 4355,3120
MOTOR_C-: U7.9 | length 71.6
  Bottom Layer w10: v2(4285,3115) 4285,3123.12 4295.31,3133.43 U7.9
MOTOR_EN: U1.14 U5.5 U6.5 U7.5 | length 1115.8
  Top Layer w10: v1(4505,3420) 4562.29,3420 4577.29,3405 v1(4580,3405) v1(4770,3405) 4800,3435 v1(4800,3470)
  Bottom Layer w10: U7.5 4354.37,3363.8 4356.12,3365.55 4370.4,3365.55 4392.66,3387.81 4474.81,3387.81 4488,3401 4488,3403 v1(4505,3420) ; U6.5 4564.37,3372.48 4578.09,3386.2 4578.09,3403.09 v1(4580,3405) ; U1.14 4591.63,3802.6 4575.19,3786.16 4575.19,3735.52 4656,3654.71 4656,3589 4775,3470 v1(4800,3470) ; v1(4770,3405) 4774.37,3400.63 U5.5
MOTOR_PWM_A: U1.22 U5.4 | length 336.8
  Bottom Layer w10: U1.22 4549.87,3595.93 4749,3396.8 4749,3389 4754.68,3383.32 U5.4
MOTOR_PWM_B: U1.23 U6.4 | length 271.5
  Bottom Layer w10: U1.23 4580.7,3541.06 4580.7,3435.39 4544.68,3399.38 U6.4
MOTOR_PWM_C: U1.26 U7.4 | length 337.7
  Bottom Layer w10: U7.4 4335.41,3348.43 4335.41,3380.45 4359.95,3405 4457.67,3405 4516,3463.33 4516,3520.83 4494.19,3542.63 U1.26
MOTOR_SCL: R11.1 U1.61 U5.2 U6.2 U7.2 | length 1417.8
  Bottom Layer w10: R11.1@4120,3942.44 4123.94,3942.44 R11.1@4129.47,3947.97 ; R11.1 4152.78,3947.44 4152.78,3960.15 4158.35,3965.72 4239.55,3965.72 U1.61 4331.18,3874.09 4331.18,3468.35 4306,3443.17 4306,3396.3 4296.04,3386.34 4296.04,3348.43 U7.2 4297.11,3345.91 4297.11,3305.35 4326.46,3276 4390.45,3276 4395.76,3270.69 4461.7,3270.69 4490.84,3299.84 ; 4503.52,3312.52 4490.84,3299.84 ; U6.2 4507.11,3345.92 4507.11,3312.52 ; U5.2 4715.31,3314.31 4665.7,3264.7 4606.35,3264.7 4605.65,3264 4526.68,3264 4490.84,3299.84
MOTOR_SDA: R10.1 U1.62 U5.3 U6.3 U7.3 | length 1488.4